# Altium PCB EXP_V111.PcbDoc (part 1 of 4)
Units mm, origin at the board's own origin, x right, y up, seen from the top; angles counter-clockwise.
Board outline 86 x 86 mm, 4 copper layers (Top Layer, Mid-Layer 1, Mid-Layer 2, Bottom Layer), stack 1.584 mm thick; 341 components, 287 nets, 1185 pads, 999 vias.
Unrouted connection lines stored in the file: 255.
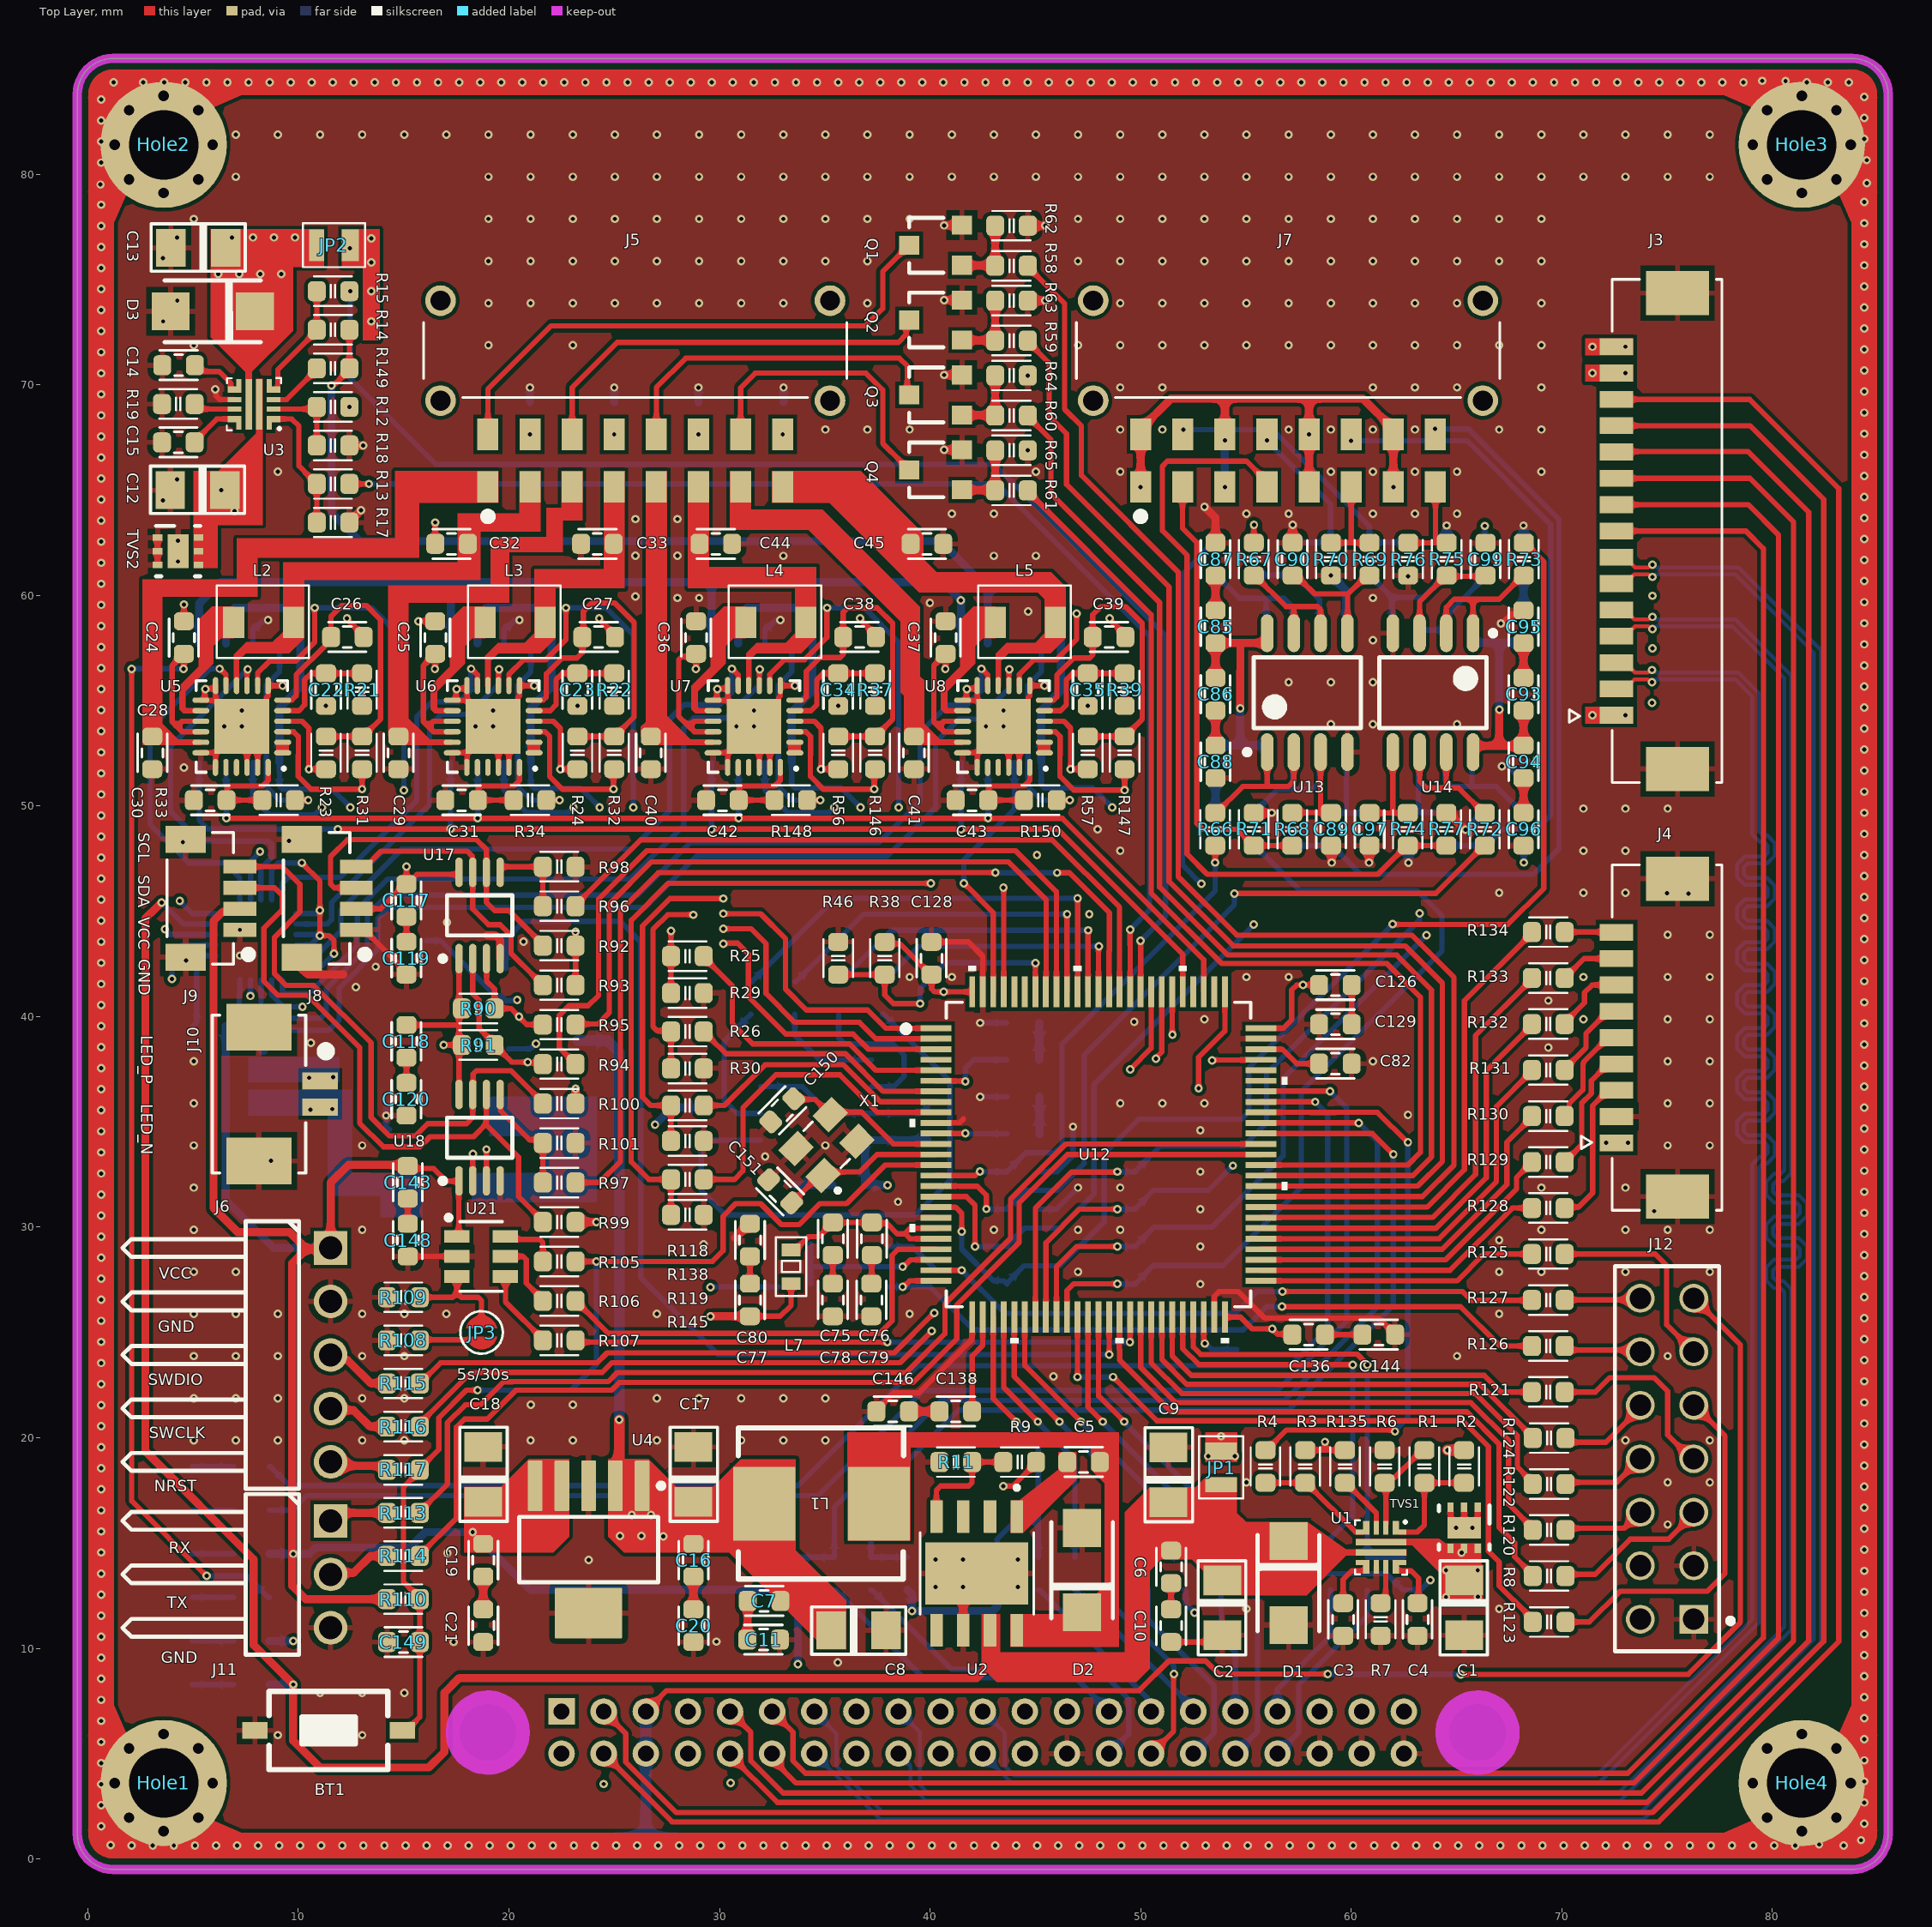
[diagram p0: Top Layer view]
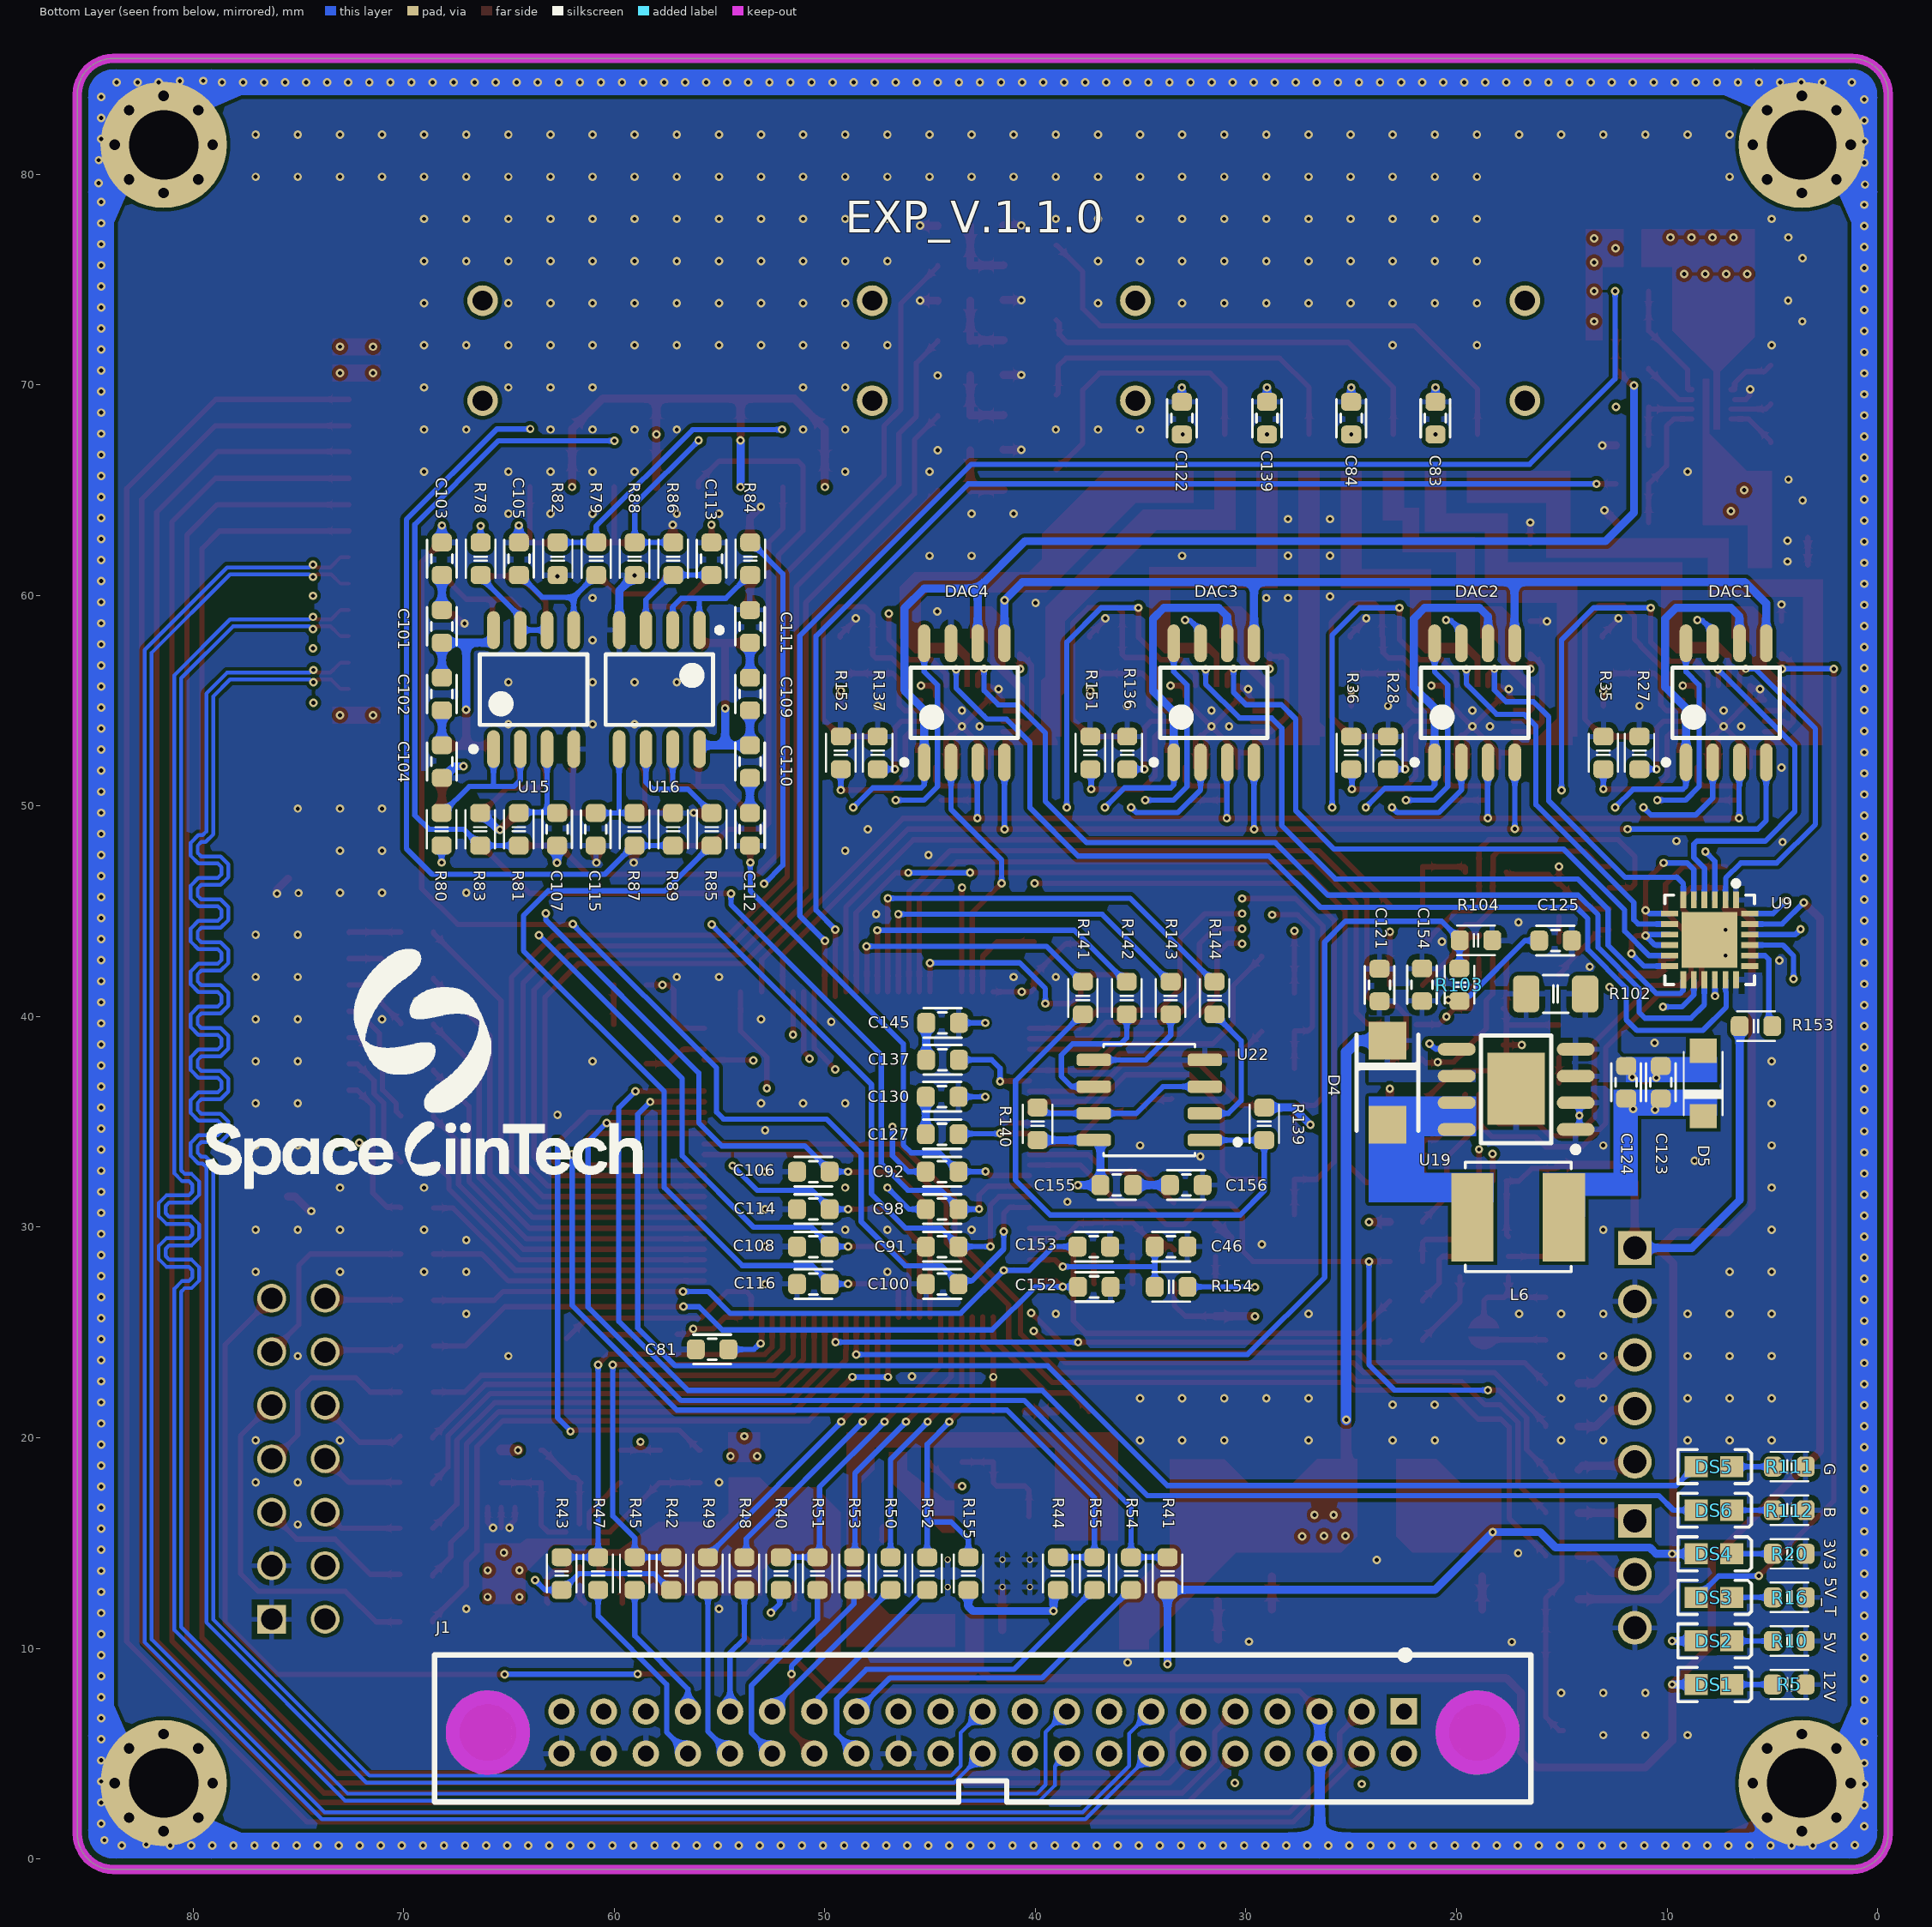
[diagram p1: Bottom Layer view, seen from below]
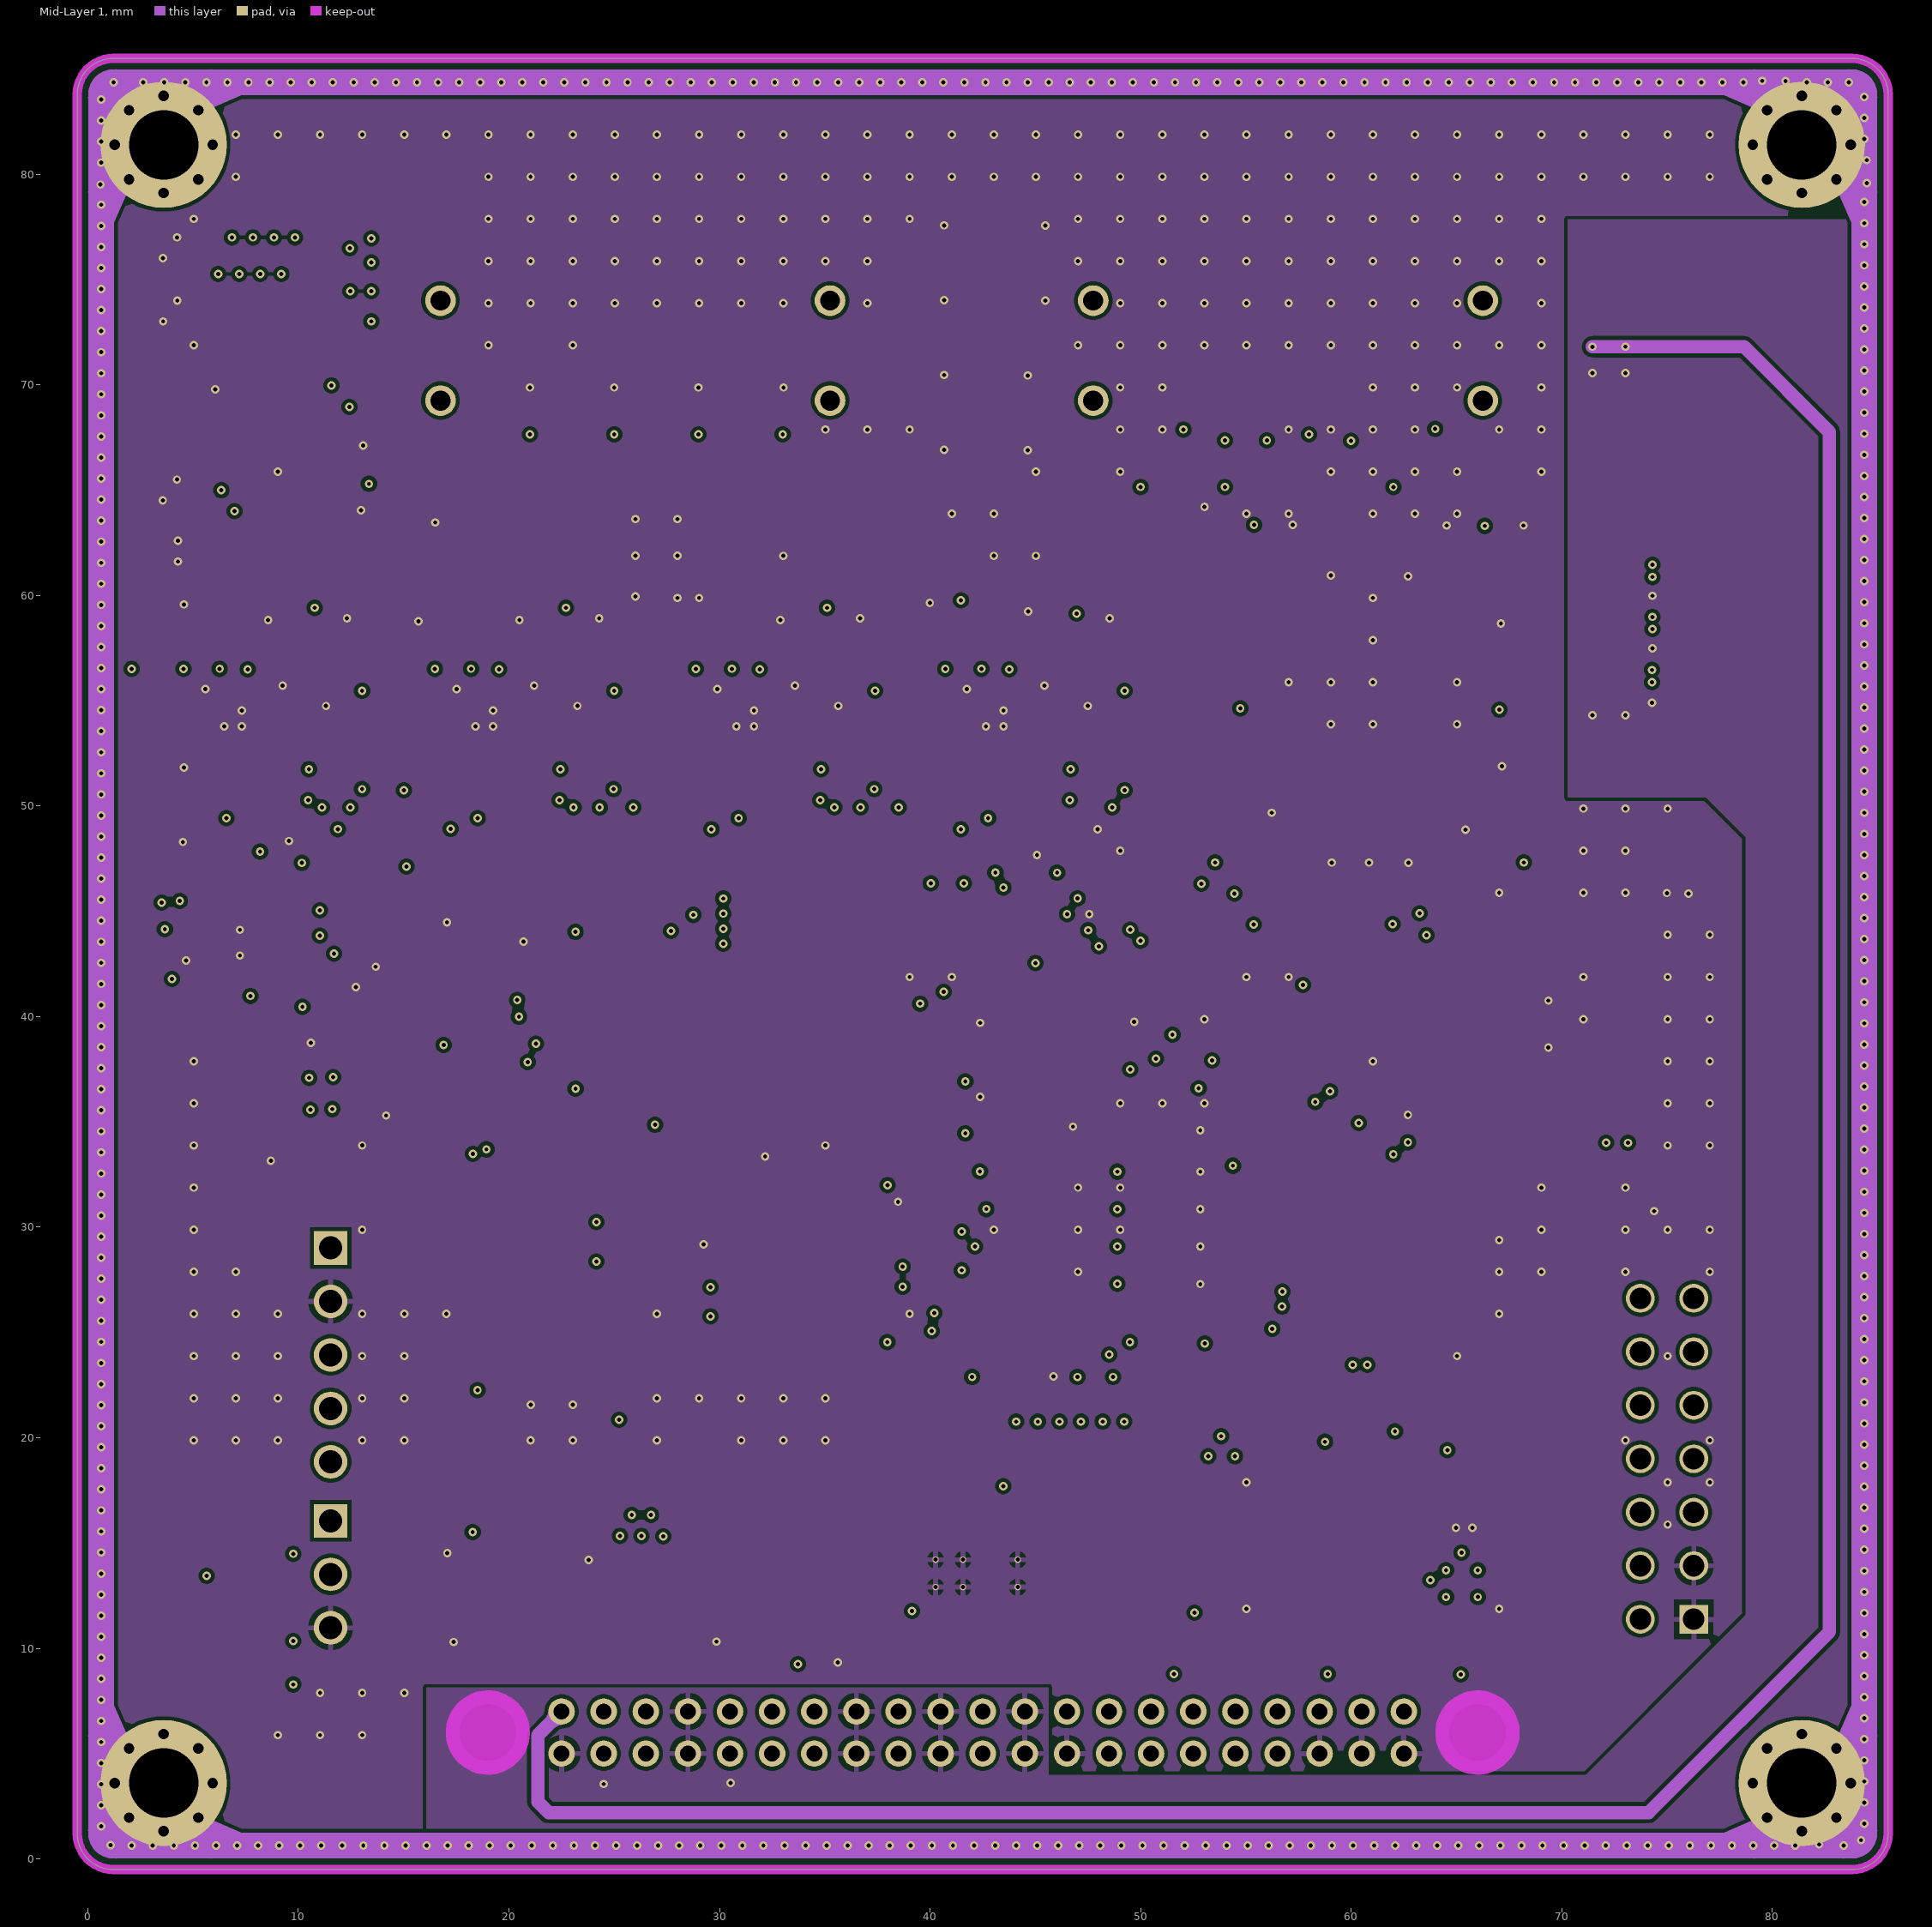
[diagram p2: Mid-Layer 1]
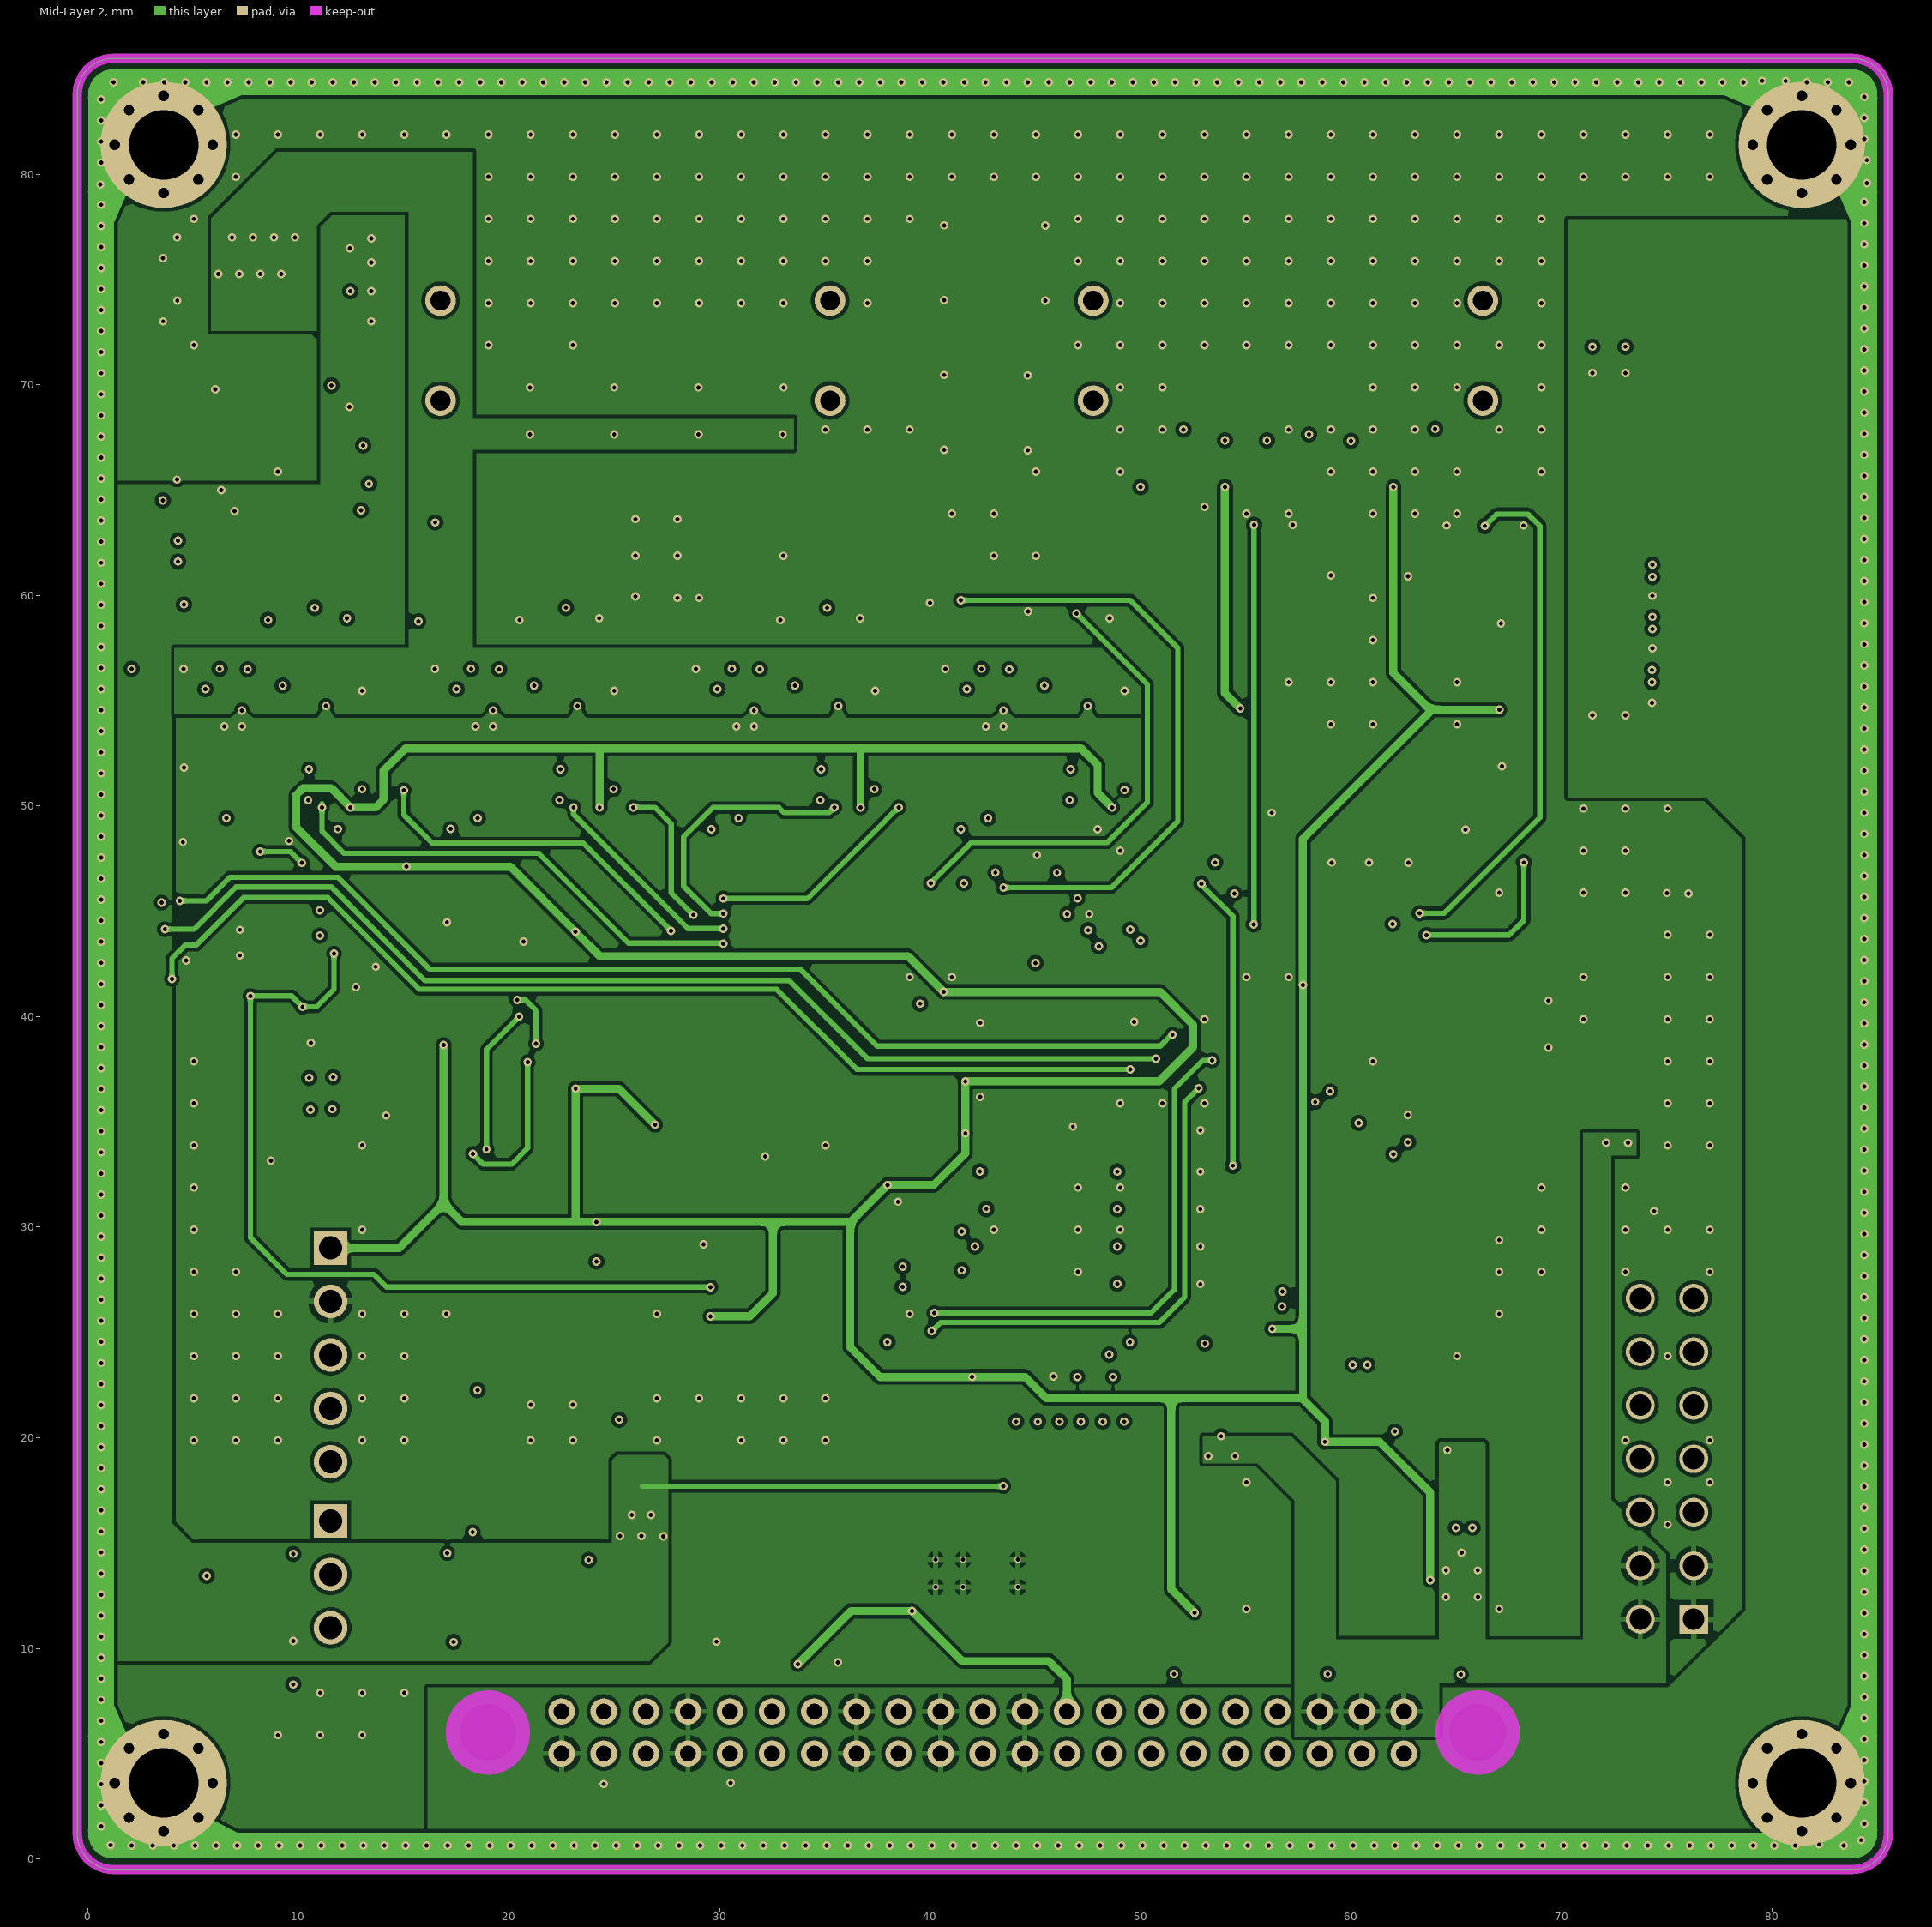
[diagram p3: Mid-Layer 2]
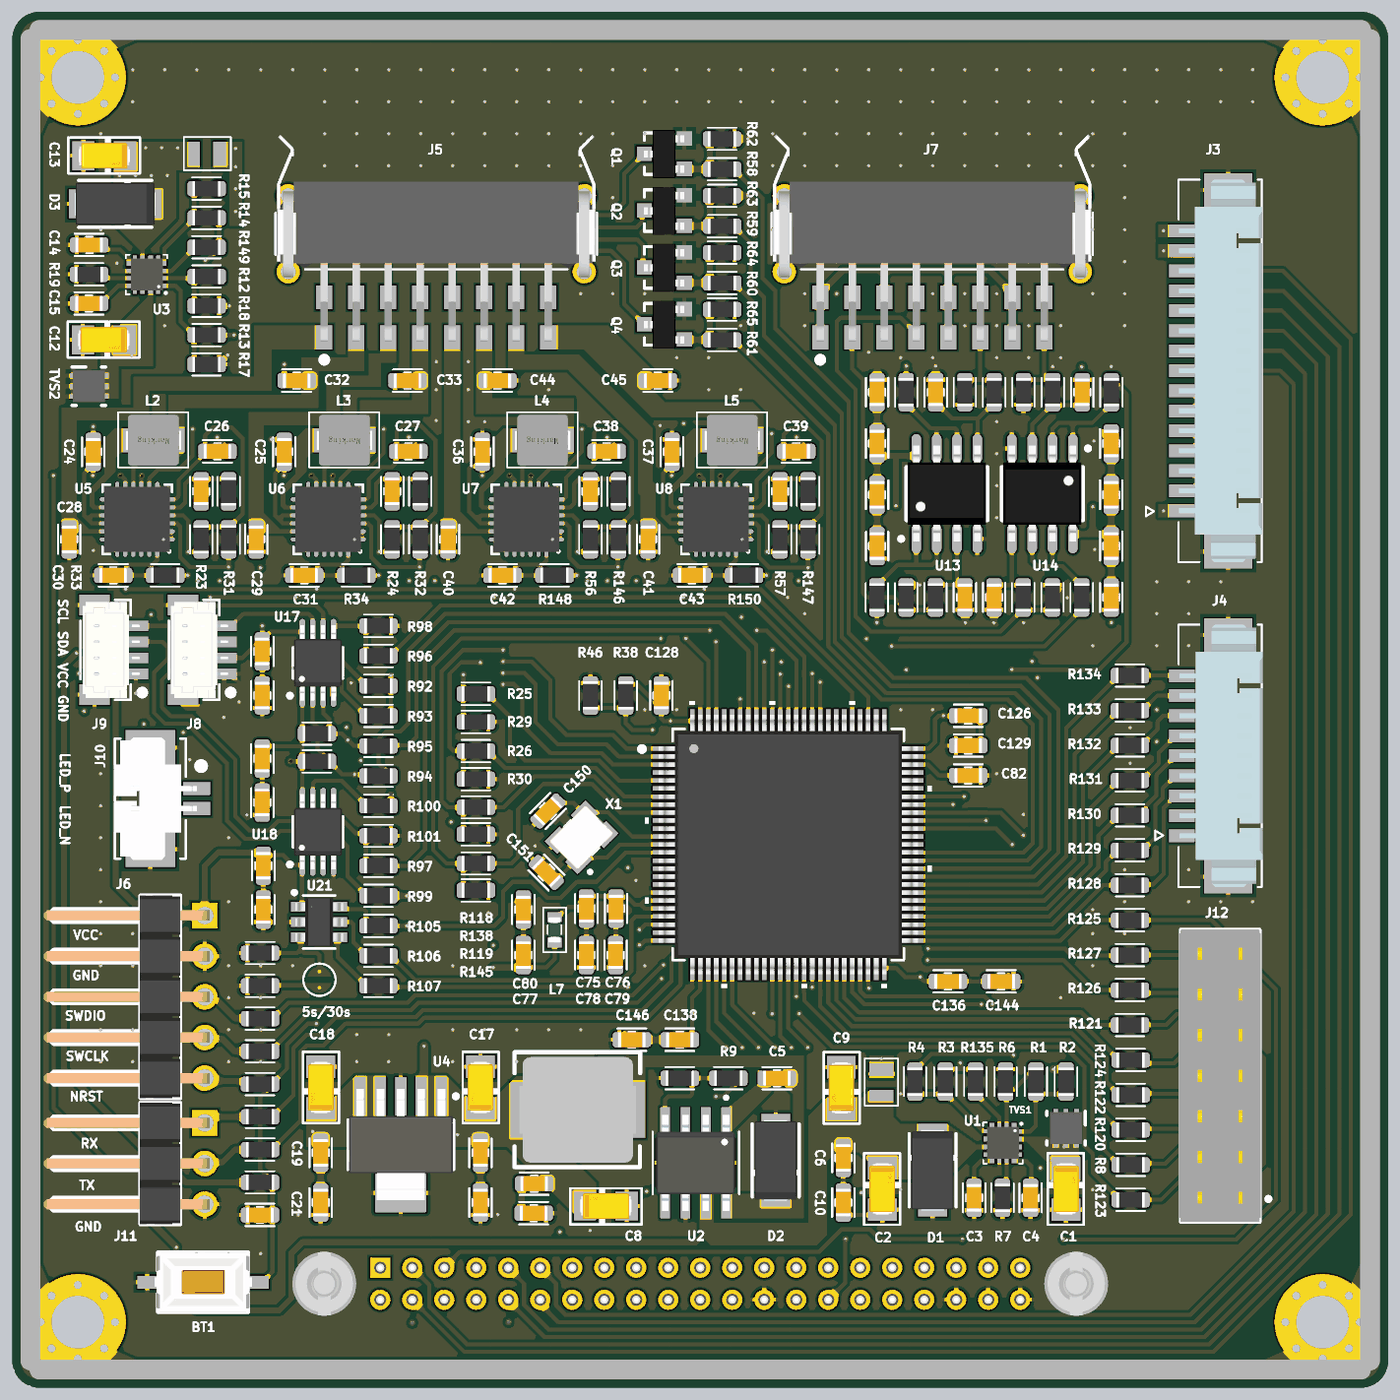
[diagram p7: 3D render of the assembled board from above, using the file's embedded part models]
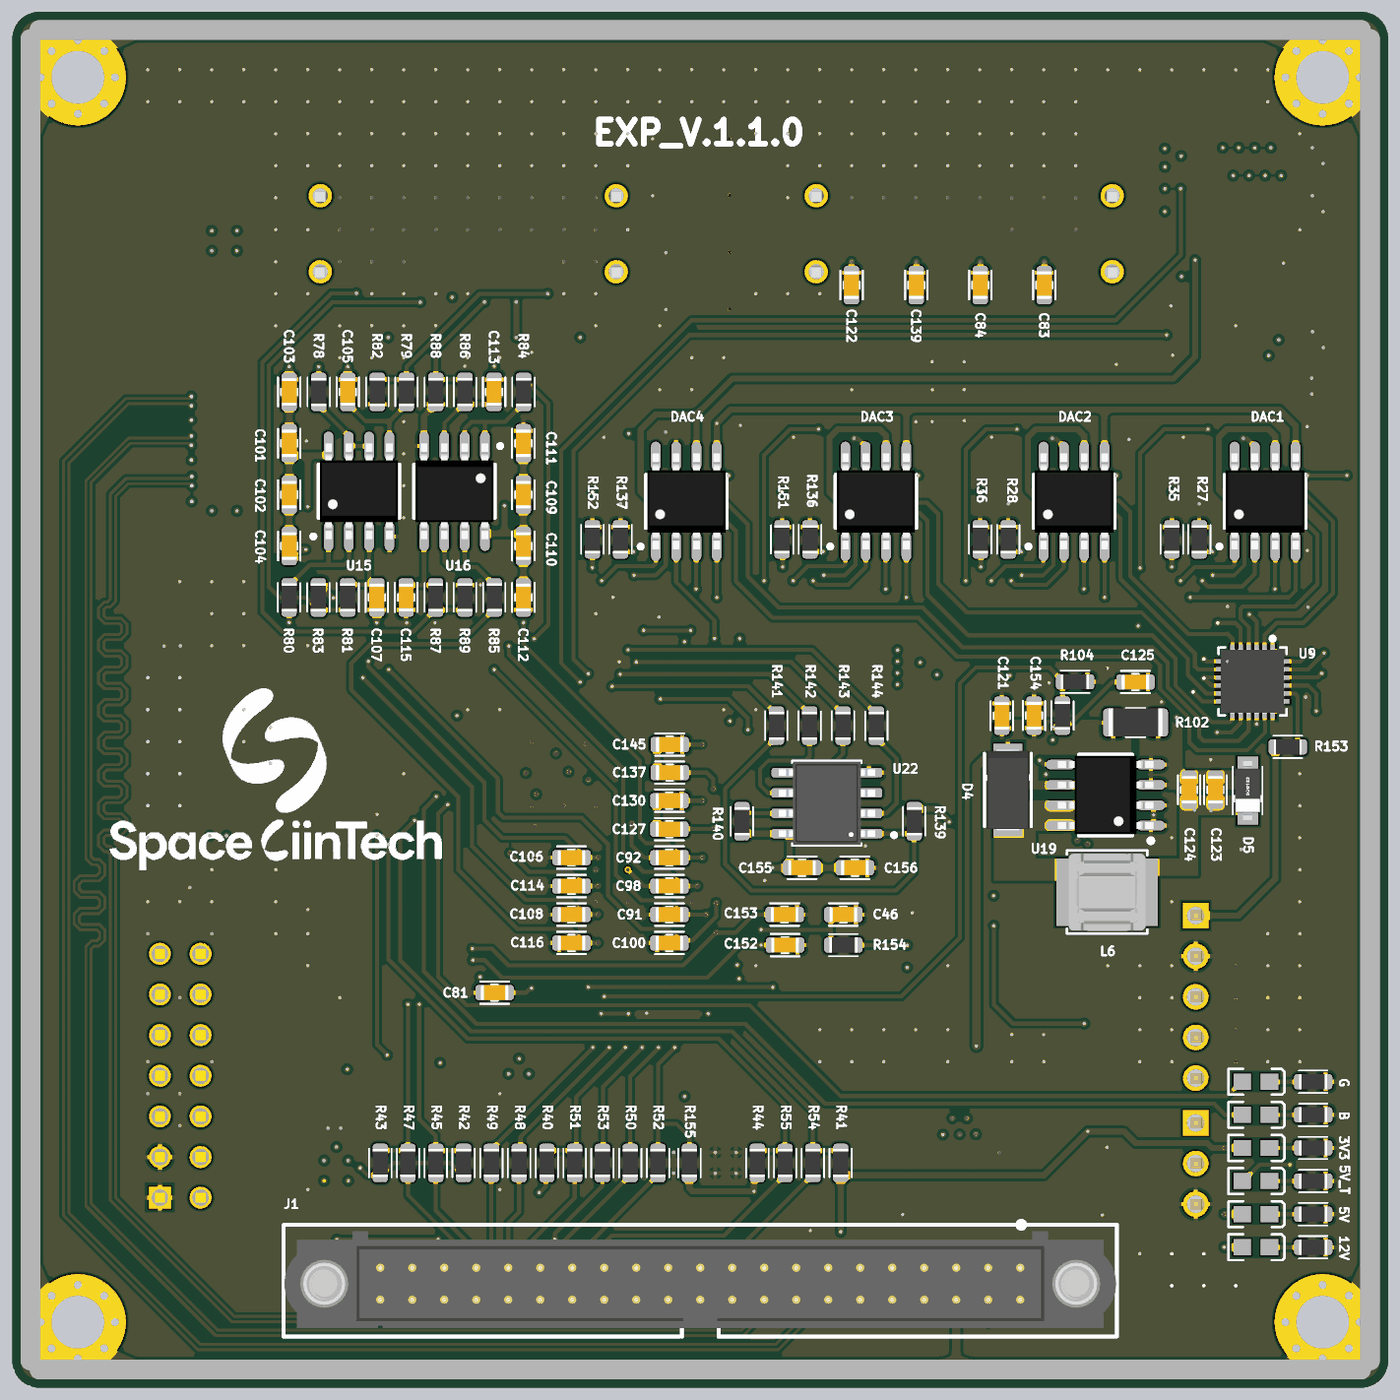
[diagram p8: 3D render of the assembled board from below, using the file's embedded part models]

## Layer stack, top to bottom
Top Solder: solder mask 0.012, SM-002, Dk 4
Top Layer: signal copper 0.04
Dielectric 1: prepreg 0.2, PP-022, Dk 4.5
Mid-Layer 1: signal copper 0.032
Dielectric2: core 1.04, Core-042, Dk 4.6
Mid-Layer 2: signal copper 0.032
Dielectric3: prepreg 0.2, PP-022, Dk 4.5
Bottom Layer: signal copper 0.04
Bottom Solder: solder mask 0.012, SM-002, Dk 4

## Board outline
1.2,-0.5 cw(c1.2,1.2) -0.5,1.2 -0.5,83.8 cw(c1.2,83.8) 1.197,85.5 1.202,85.5 83.799,85.5 83.804,85.5 cw(c83.8,83.8) 85.5,83.803 85.5,83.798 85.5,1.2 cw(c83.8,1.2) 83.8,-0.5

## Design rules (kind name [scope] priority, off if disabled: settings)
Clearance [NOT InNet('PROTECT_EMI') and NOT OnLayer('Keep-Out Layer') vs not OnLayer('Keep-out Layer')] p1: gap=0.178 ignorepadtopadclearanceinfootprint=TRUE except(0.15: Arc-Arc Arc-Track Track-Track)
DiffPairsRouting [InDifferentialPairClass('DIF100')] p1: maxlimit=0.15 minlimit=0.127 mostfreqgap=0.15 toplayer_mingap=0.15 toplayer_minwidth=0.18 toplayer_maxwidth=0.18 toplayer_prefwidth=0.18 midlayer1_maxgap=0.127 midlayer1_prefgap=0.127 midlayer1_minwidth=0.071 midlayer1_maxwidth=0.071 midlayer1_prefwidth=0.071 midlayer2_maxgap=0.127 midlayer2_prefgap=0.127 midlayer2_minwidth=0.071 midlayer2_maxwidth=0.071 midlayer2_prefwidth=0.071 bottomlayer_mingap=0.15 bottomlayer_minwidth=0.18 bottomlayer_maxwidth=0.18 bottomlayer_prefwidth=0.18 impedanceprofiledriven=TRUE impedanceprofileid={F898C893-B88C-4CB9-82E4-B530A9EF1E47} impedanceprofilevalue=100.000000 maxuncoupledlength=12.7
HoleSize [All] p1: absolutevalues=TRUE maxlimit=4 minlimit=0.025 maxpercent=80.000 minpercent=20.000
Length [InNetClass('USB_DATA')] p1: maxlimit=10 minlimit=0 usedelayunits=TRUE mindelay=84.500000 maxdelay=84.500000
MatchedLengths MatchedLengths_1 [InDifferentialPairClass('DIF100')] p1: tolerance=25.4 checknetsindiffpair=FALSE checkdiffpairvsdiffpair=TRUE checkxsignals=TRUE checkothers=TRUE usedelayunits=TRUE delaytolerance=20.000000
MatchedLengths [InAnyDifferentialPair] p2: tolerance=25.4 checknetsindiffpair=TRUE checkdiffpairvsdiffpair=FALSE checkxsignals=FALSE checkothers=FALSE usedelayunits=TRUE delaytolerance=5.000000
MinimumSolderMaskSliver [All] p1: minsoldermaskwidth=0.14
PolygonConnect [All] p1: thpad.connectstyle=Relief thpad.reliefconductorwidth=0.254 thpad.reliefentries=4 thpad.polygonreliefangle="90 Angle" thpad.airgapwidth=0.254 smdpad.connectstyle=Relief smdpad.reliefconductorwidth=0.254 smdpad.reliefentries=4 smdpad.polygonreliefangle="90 Angle" smdpad.airgapwidth=0.254 via.connectstyle=Direct via.reliefconductorwidth=0.254 via.reliefentries=4 via.polygonreliefangle="90 Angle" via.airgapwidth=0.254
RoutingVias [All] p1: holewidth=0.2 width=0.4 viastyle="Through Hole" minholewidth=0.2 minwidth=0.4 maxholewidth=0.2 maxwidth=0.4
SilkToSilkClearance [All] p1: silktosilkclearance=0.2
SilkToSolderMaskClearance [IsPad] p1: minsilkscreentomaskgap=0.1 clearancetoexposedcopper=TRUE
SolderMaskExpansion [All] p1: expansion=0.102 istentingtop=FALSE
SupplyNets "Schematic Supply Nets_7" [InNet('GND_CAM')] p1: voltage=0.000
SupplyNets "Schematic Supply Nets_6" [InNet('12V')] p2: voltage=0.000
SupplyNets "Schematic Supply Nets_5" [InNet('5V_TEMP')] p3: voltage=0.000
SupplyNets "Schematic Supply Nets_4" [InNet('5V')] p4: voltage=0.000
SupplyNets "Schematic Supply Nets_3" [InNet('GND')] p5: voltage=0.000
SupplyNets "Schematic Supply Nets_2" [InNet('5V_CAM')] p6: voltage=0.000
SupplyNets "Schematic Supply Nets_1" [InNet('12V_EXP')] p7: voltage=0.000
SupplyNets "Schematic Supply Nets" [InNet('+3.3')] p8: voltage=0.000
Width [All] p1: maxlimit=2 minlimit=0.254 preferedwidth=0.381
25 further rules are at their usual default settings.

## Classes and differential pairs
differential pair class DIF100: CAM_CK CAM_D0 CAM_D1
component class FRAM: C155 C156 R139 R140 R141 R142 R143 R144 U22
component class TEC_DRV: C22 C23 C24 C25 C26 C27 C28 C29 C30 C31 C32 C33 C34 C35 C36 C37 C38 C39 C40 C41 C42 C43 C44 C45 C46 DAC1 DAC2 DAC3 DAC4 g L2 L3 L4 L5 R21 R22 R23 R24 R25 R26 R27 R28 R29 R30 R31 R32 R33 R34 R35 R36 R37 R39 R56 R57 R118 R119 R136 R137 R138 R145 R146 R147 R148 R150 R151 R152 R153 R154 U5 U6 U7 U8 U9
component class POWER: C1 C2 C3 C4 C5 C6 C7 C8 C9 C10 C11 C12 C13 C14 C15 C16 C17 C18 C19 C20 C21 D1 D2 D3 DS1 DS2 DS3 DS4 JP1 JP2 L1 R1 R2 R3 R4 R5 R6 R7 R9 R10 R11 R12 R13 R14 R15 R16 R17 R18 R19 R20 R135 R149 TVS1 TVS2 U1 U2 U3 U4
component class IR_LED: C121 C123 C124 C125 C154 D4 D5 J10 L6 R102 R103 R104 U19
component class HEADER_2: Hole1 Hole2 Hole3 Hole4 J5 J7
component class HEADER_1: C152 C153 J1 J3 J4 J12 R8 R40 R41 R42 R43 R44 R45 R47 R48 R49 R50 R51 R52 R53 R54 R55 R120 R121 R122 R123 R124 R125 R126 R127 R128 R129 R130 R131 R132 R133 R134 R155
component class NTC: C85 C86 C87 C88 C89 C90 C91 C92 C93 C94 C95 C96 C97 C98 C99 C100 C101 C102 C103 C104 C105 C106 C107 C108 C109 C110 C111 C112 C113 C114 C115 C116 R66 R67 R68 R69 R70 R71 R72 R73 R74 R75 R76 R77 R78 R79 R80 R81 R82 R83 R84 R85 R86 R87 R88 R89 U13 U14 U15 U16
component class MCU: BT1 C75 C76 C77 C78 C79 C80 C81 C82 C126 C127 C128 C129 C130 C136 C137 C138 C143 C144 C145 C146 C148 C149 C150 C151 DS5 DS6 J6 J11 JP3 L7 R38 R46 R105 R106 R107 R108 R109 R110 R111 R112 R113 R114 R115 R116 R117 U12 U21 X1
component class I2C_SENSOR: C117 C118 C119 C120 J8 J9 R90 R91 R92 R93 R94 R95 R96 R97 R98 R99 R100 R101 U17 U18
component class HEATER: C83 C84 C122 C139 Q1 Q2 Q3 Q4 R58 R59 R60 R61 R62 R63 R64 R65
differential pair CAM_D1: +CAM_D1_P -CAM_D1_N
differential pair CAM_D0: +CAM_D0_P -CAM_D0_N
differential pair CAM_CK: +CAM_CK_P -CAM_CK_N

## Components (designator, comment, footprint, x,y, rotation, side; value= is the part's Value field where it differs from the comment)
BT1 "BT_NRST" SW1-SMD 11.43,6.096 r0 top value="SW chip 2 pin"
C1 "33uF/16V" TANTALUM-SMD-1206 65.364,11.928 r90 top
C2 "33uF/16V" TANTALUM-SMD-1206 53.881,11.928 r90 top
C3 "2.2nF/16V" CAP_C_1608X80 59.617,11.37 r90 top value=33pF
C4 "2.2nF/16V" CAP_C_1608X80 63.149,11.37 r90 top value=33pF
C5 "0.01uF/16V" CAP_C_1608X80 47.292,18.846 r180 top value=33pF
C6 "0.22uF/16V" CAP_C_1608X80 51.445,13.865 r90 top value=33pF
C7 "0.22uF/10V" CAP_C_1608X80 32.121,12.25 r0 top value=33pF
C8 "33uF/16V" TANTALUM-SMD-1206 36.604,10.858 r180 top
C9 "33uF/16V" TANTALUM-SMD-1206 51.32,18.234 r270 top
C10 "0.22uF/16V" CAP_C_1608X80 51.445,11.074 r90 top value=33pF
C11 "0.22uF/10V" CAP_C_1608X80 32.089,10.412 r180 top value=33pF
C12 "33uF/16V" TANTALUM-SMD-1206 5.216,64.995 r0 top
C13 "33uF/16V" TANTALUM-SMD-1206 5.248,76.505 r0 top
C14 "2.2nF/16V" CAP_C_1608X80 4.309,70.93 r0 top value=33pF
C15 "2.2nF/16V" CAP_C_1608X80 4.295,67.269 r0 top value=33pF
C16 "0.22uF/10V" CAP_C_1608X80 28.761,14.186 r90 top value=33pF
C17 "33uF/16V" TANTALUM-SMD-1206 28.761,18.258 r270 top
C18 "33uF/16V" TANTALUM-SMD-1206 18.779,18.258 r270 top
C19 "0.22uF/10V" CAP_C_1608X80 18.779,14.186 r90 top value=33pF
C20 "0.22uF/10V" CAP_C_1608X80 28.761,11.074 r90 top value=33pF
C21 "0.22uF/10V" CAP_C_1608X80 18.779,11.074 r90 top value=33pF
C22 "0.1uF/10V" CAP_C_1608X80 11.312,55.525 r90 top value=33pF
C23 "0.1uF/10V" CAP_C_1608X80 23.25,55.525 r90 top value=33pF
C24 "10uF/10V" CAP_C_1608X80 4.562,58 r270 top value=33pF
C25 "10uF/10V" CAP_C_1608X80 16.5,58 r270 top value=33pF
C26 "0.1uF/10V" CAP_C_1608X80 12.325,58.025 r180 top value=33pF
C27 "0.1uF/10V" CAP_C_1608X80 24.262,58.025 r180 top value=33pF
C28 "0.1uF/10V" CAP_C_1608X80 3.062,52.525 r90 top value=33pF
C29 "0.1uF/10V" CAP_C_1608X80 14.75,52.525 r90 top value=33pF
C30 "0.1uF/10V" CAP_C_1608X80 5.812,50.275 r0 top value=33pF
C31 "0.1uF/10V" CAP_C_1608X80 17.75,50.275 r0 top value=33pF
C32 "10uF/10V" CAP_C_1608X80 17.275,62.45 r0 top value=33pF
C33 "10uF/10V" CAP_C_1608X80 24.2,62.45 r0 top value=33pF
C34 "0.1uF/10V" CAP_C_1608X80 35.637,55.525 r90 top value=33pF
C35 "0.1uF/10V" CAP_C_1608X80 47.488,55.525 r90 top value=33pF
C36 "10uF/10V" CAP_C_1608X80 28.887,58 r270 top value=33pF
C37 "10uF/10V" CAP_C_1608X80 40.738,58 r270 top value=33pF
C38 "0.1uF/10V" CAP_C_1608X80 36.649,58.025 r180 top value=33pF
C39 "0.1uF/10V" CAP_C_1608X80 48.5,58.025 r180 top value=33pF
C40 "0.1uF/10V" CAP_C_1608X80 26.737,52.525 r90 top value=33pF
C41 "0.1uF/10V" CAP_C_1608X80 39.238,52.525 r90 top value=33pF
C42 "0.1uF/10V" CAP_C_1608X80 30.137,50.275 r0 top value=33pF
C43 "0.1uF/10V" CAP_C_1608X80 41.988,50.275 r0 top value=33pF
C44 "10uF/10V" CAP_C_1608X80 29.825,62.45 r180 top value=33pF
C45 "10uF/10V" CAP_C_1608X80 39.85,62.45 r180 top value=33pF
C46 "0.1uF/10V" CAP_C_1608X80 33.553,29.076 r0 bottom value=33pF
C75 "0.22uF/10V" CAP_C_1608X80 35.382,29.45 r90 top value=33pF
C76 "1uF/10V" CAP_C_1608X80 37.236,29.45 r90 top value=33pF
C77 "1uF/10V" CAP_C_1608X80 31.445,26.542 r270 top value=33pF
C78 "0.22uF/10V" CAP_C_1608X80 35.382,26.542 r90 top value=33pF
C79 "1uF/10V" CAP_C_1608X80 37.211,26.542 r90 top value=33pF
C80 "1uF/10V" CAP_C_1608X80 31.445,29.387 r270 top value=33pF
C81 "1uF/10V" CAP_C_1608X80 55.353,24.197 r180 bottom value=33pF
C82 "1uF/10V" CAP_C_1608X80 59.25,37.764 r180 top value=33pF
C83 "4.7uF/10V" CAP_C_1608X80 21,68.416 r270 bottom value=33pF
C84 "0.1uF/10V" CAP_C_1608X80 25,68.416 r270 bottom value=33pF
C85 "0.22uF/10V" CAP_C_1608X80 53.554,58.515 r270 top value=33pF
C86 "0.22uF/10V" CAP_C_1608X80 53.554,55.308 r90 top value=33pF
C87 "0.22uF/10V" CAP_C_1608X80 53.554,61.722 r270 top value=33pF
C88 "0.22uF/10V" CAP_C_1608X80 53.554,52.102 r90 top value=33pF
C89 "0.22uF/10V" CAP_C_1608X80 59.041,48.895 r90 top value=33pF
C90 "0.22uF/10V" CAP_C_1608X80 57.219,61.722 r270 top value=33pF
C91 "0.22uF/10V" CAP_C_1608X80 44.427,29.076 r180 bottom value=33pF
C92 "0.22uF/10V" CAP_C_1608X80 44.427,32.634 r180 bottom value=33pF
C93 "0.22uF/10V" CAP_C_1608X80 68.186,55.308 r270 top value=33pF
C94 "0.22uF/10V" CAP_C_1608X80 68.186,52.102 r90 top value=33pF
C95 "0.22uF/10V" CAP_C_1608X80 68.186,58.515 r270 top value=33pF
C96 "0.22uF/10V" CAP_C_1608X80 68.186,48.895 r90 top value=33pF
C97 "0.22uF/10V" CAP_C_1608X80 60.87,48.895 r90 top value=33pF
C98 "0.22uF/10V" CAP_C_1608X80 44.427,30.855 r180 bottom value=33pF
C99 "0.22uF/10V" CAP_C_1608X80 66.379,61.722 r270 top value=33pF
C100 "0.22uF/10V" CAP_C_1608X80 44.427,27.297 r180 bottom value=33pF
C101 "0.22uF/10V" CAP_C_1608X80 68.186,58.53 r270 bottom value=33pF
C102 "0.22uF/10V" CAP_C_1608X80 68.186,55.318 r90 bottom value=33pF
C103 "0.22uF/10V" CAP_C_1608X80 68.186,61.742 r270 bottom value=33pF
C104 "0.22uF/10V" CAP_C_1608X80 68.186,52.107 r90 bottom value=33pF
C105 "0.22uF/10V" CAP_C_1608X80 64.528,61.742 r270 bottom value=33pF
C106 "0.22uF/10V" CAP_C_1608X80 50.547,32.634 r180 bottom value=33pF
C107 "0.22uF/10V" CAP_C_1608X80 62.715,48.895 r90 bottom value=33pF
C108 "0.22uF/10V" CAP_C_1608X80 50.547,29.076 r180 bottom value=33pF
C109 "0.22uF/10V" CAP_C_1608X80 53.554,55.318 r270 bottom value=33pF
C110 "0.22uF/10V" CAP_C_1608X80 53.554,52.107 r90 bottom value=33pF
C111 "0.22uF/10V" CAP_C_1608X80 53.554,58.53 r270 bottom value=33pF
C112 "0.22uF/10V" CAP_C_1608X80 53.554,48.895 r90 bottom value=33pF
C113 "0.22uF/10V" CAP_C_1608X80 55.383,61.742 r270 bottom value=33pF
C114 "0.22uF/10V" CAP_C_1608X80 50.547,30.855 r180 bottom value=33pF
C115 "0.22uF/10V" CAP_C_1608X80 60.883,48.895 r90 bottom value=33pF
C116 "0.22uF/10V" CAP_C_1608X80 50.547,27.297 r180 bottom value=33pF
C117 "1uF/10V" CAP_C_1608X80 15.131,45.518 r90 top value=33pF
C118 "0.22uF/10V" CAP_C_1608X80 15.131,38.824 r90 top value=33pF
C119 "1uF/10V" CAP_C_1608X80 15.131,42.771 r90 top value=33pF
C120 "0.22uF/10V" CAP_C_1608X80 15.131,36.077 r90 top value=33pF
C121 "4.7uF/10V" CAP_C_1608X80 23.65,41.5 r270 bottom value=33pF
C122 "0.1uF/10V" CAP_C_1608X80 33.045,68.416 r270 bottom value=33pF
C123 "1uF/10V" CAP_C_1608X80 10.297,36.876 r90 bottom value=33pF
C124 "1uF/10V" CAP_C_1608X80 11.944,36.876 r90 bottom value=33pF
C125 "470nF/10V" CAP_C_1608X80 15.301,43.607 r0 bottom value=33pF
C126 "0.22uF/10V" CAP_C_1608X80 59.25,41.5 r180 top value=33pF
C127 "0.22uF/10V" CAP_C_1608X80 44.427,34.413 r180 bottom value=33pF
C128 "4.7uF/10V" CAP_C_1608X80 40.07,42.77 r270 top value=33pF
C129 "0.22uF/10V" CAP_C_1608X80 59.25,39.632 r0 top value=33pF
C130 "0.22uF/10V" CAP_C_1608X80 44.427,36.192 r0 bottom value=33pF
C136 "0.22uF/10V" CAP_C_1608X80 57.98,24.897 r180 top value=33pF
C137 "0.22uF/10V" CAP_C_1608X80 44.407,37.946 r180 bottom value=33pF
C138 "0.22uF/10V" CAP_C_1608X80 41.223,21.25 r0 top value=33pF
C139 "0.1uF/10V" CAP_C_1608X80 29,68.416 r270 bottom value=33pF
C143 "0.22uF/10V" CAP_C_1608X80 15.194,32.131 r90 top value=33pF
C144 "0.22uF/10V" CAP_C_1608X80 61.309,24.897 r180 top value=33pF
C145 "0.22uF/10V" CAP_C_1608X80 44.407,39.7 r0 bottom value=33pF
C146 "0.22uF/10V" CAP_C_1608X80 38.224,21.25 r0 top value=33pF
C148 "0.22uF/10V" CAP_C_1608X80 15.194,29.384 r90 top value=33pF
C149 "0.22uF/10V" CAP_C_1608X80 14.986,10.299 r0 top value=33pF
C150 "12pF/10V" CAP_C_1608X80 32.981,35.549 r225 top value=33pF
C151 "12pF/10V" CAP_C_1608X80 32.882,31.702 r315 top value=33pF
C152 "0.22uF/10V" CAP_C_1608X80 37.2,27.165 r0 bottom value=33pF
C153 "0.22uF/10V" CAP_C_1608X80 37.225,29.076 r0 bottom value=33pF
C154 "0.1uF/10V" CAP_C_1608X80 21.637,41.511 r270 bottom value=33pF
C155 "0.22uF/10V" CAP_C_1608X80 36.136,31.999 r0 bottom value=33pF
C156 "0.22uF/10V" CAP_C_1608X80 32.834,31.999 r0 bottom value=33pF
D1 "SS54" DO214-AC-SMA 57.025,13.096 r270 top
D2 "SS54" DO214-AC-SMA 47.216,13.71 r90 top
D3 "SS54" DO214-AC-SMA 5.934,73.496 r180 top
D4 "SS54" DO214-AC-SMA 23.274,36.86 r270 bottom
D5 "1N4148W-TP" SOD-123 8.282,36.822 r0 bottom value=100V/300MA
DAC1 "MCP4921-E/SN" SO8 7.197,54.9 r90 bottom
DAC2 "MCP4921-E/SN" SO8 19.135,54.9 r90 bottom
DAC3 "MCP4921-E/SN" SO8 31.522,54.9 r90 bottom
DAC4 "MCP4921-E/SN" SO8 43.373,54.9 r90 bottom
DS1 "RED" LED-0603-BLUE 7.772,8.28 r180 bottom value="LED 3 - 5 ly 2 Colour"
DS2 "RED" LED-0603-BLUE 7.772,10.35 r180 bottom value="LED 3 - 5 ly 2 Colour"
DS3 "RED" LED-0603-BLUE 7.772,12.419 r180 bottom value="LED 3 - 5 ly 2 Colour"
DS4 "YELLOW" LED-0603-BLUE 7.772,14.488 r180 bottom value="LED 3 - 5 ly 2 Colour"
DS5 "GREEN" LED-0603-BLUE 7.772,18.627 r180 bottom value="LED 3 - 5 ly 2 Colour"
DS6 "BLUE" LED-0603-BLUE 7.772,16.557 r180 bottom value="LED 3 - 5 ly 2 Colour"
Hole1 "hole_space" HOLE_SPACE 3.6,3.6 r0 top
Hole2 "hole_space" HOLE_SPACE 3.6,81.4 r0 top
Hole3 "hole_space" HOLE_SPACE 81.4,81.4 r0 top
Hole4 "hole_space" HOLE_SPACE 81.4,3.6 r0 top
J1 "M80-5114242" M80-5114242 42.5,6 r0 bottom locked
J3 "0532611571" 0532611571 75,63.06 r90 top
J4 "0532610971" 0532610971 75,39 r90 top
J5 "M80-6661642" M80-6661642 26,72 r180 top
J6 "JP5" JP5-D1C 8.992,17.582 r270 top locked
J7 "M80-6661642" M80-6661642 57,72 r180 top locked
J8 "BM04B-SRSS-TB" BM04B-SRSS-TB 10.866,45.618 r90 top
J9 "BM04B-SRSS-TB" BM04B-SRSS-TB 5.339,45.618 r90 top
J10 "0532610271" 0532610271 8.128,36.322 r90 top locked
J11 "JP3" JP3-D1C 8.992,9.703 r270 top locked
J12 "ESQ-107-48-G-D" ESQ-107-37-G-D 75,19 r90 top
JP1 "jumper2" JUMPER 53.823,18.57 r270 top
JP2 "jumper2" JUMPER 11.667,76.631 r180 top
JP3 "jumper2" JUMPER2 18.7,25 r180 top
L1 "SRP7050TA-220M" PSM6050 34.846,16.868 r90 top
L2 "1uH" L-SMD-M-3.5X3.5X2MM 8.312,58.75 r270 top
L3 "1uH" L-SMD-M-3.5X3.5X2MM 20.25,58.75 r270 top
L4 "1uH" L-SMD-M-3.5X3.5X2MM 32.637,58.75 r270 top
L5 "1uH" L-SMD-M-3.5X3.5X2MM 44.488,58.75 r270 top
L6 "82uH" L-SMD-M-4.8X4.8X2.8MM 17.07,30.472 r270 bottom
L7 "10uH/250mA" L-SMD-0603 33.401,28.117 r90 top
Q1 "AO3400A" SOT23-13_2 40.258,76.632 r90 top
Q2 "AO3400A" SOT23-13_2 40.258,73.076 r90 top
Q3 "AO3400A" SOT23-13_2 40.258,69.52 r90 top
Q4 "AO3400A" SOT23-13_2 40.258,65.964 r90 top
R1 "11k" RES_C_1608X60 63.476,18.634 r90 top
R2 "470k" RES_C_1608X60 65.364,18.634 r270 top
R3 "10k" RES_C_1608X60 57.814,18.634 r270 top
R4 "22R" RES_C_1608X60 55.927,18.634 r90 top
R5 "4.7k" RES_C_1608X60 4.191,8.28 r180 bottom
R6 "47k" RES_C_1608X60 61.589,18.634 r90 top
R7 "1k" RES_C_1608X60 61.395,11.37 r270 top
R8 "22R" RES_C_1608X60 69.4,13.434 r0 top
R9 "10k" RES_C_1608X60 44.258,18.846 r180 top
R10 "2.2k" RES_C_1608X60 4.191,10.35 r180 bottom
R11 "3.24k" RES_C_1608X60 41.223,18.846 r180 top
R12 "470k" RES_C_1608X60 11.648,68.954 r180 top
R13 "120R" RES_C_1608X60 11.648,65.293 r180 top
R14 "10k" RES_C_1608X60 11.648,72.615 r180 top
R15 "22R" RES_C_1608X60 11.648,74.445 r0 top
R16 "2.2k" RES_C_1608X60 4.191,12.419 r180 bottom
R17 "10k" RES_C_1608X60 11.648,63.463 r0 top
R18 "130k" RES_C_1608X60 11.648,67.124 r0 top
R19 "1k" RES_C_1608X60 4.295,69.087 r180 top
R20 "2.2k" RES_C_1608X60 4.191,14.488 r180 bottom
R21 "10R" RES_C_1608X60 13.025,55.525 r90 top
R22 "10R" RES_C_1608X60 25,55.525 r90 top
R23 "91k" RES_C_1608X60 11.312,52.525 r270 top
R24 "91k" RES_C_1608X60 23.25,52.525 r270 top
R25 "22R" RES_C_1608X60 28.475,42.87 r180 top
R26 "22R" RES_C_1608X60 28.475,39.291 r180 top
R27 "36.5k" RES_C_1608X60 11.312,52.525 r90 bottom
R28 "36.5k" RES_C_1608X60 23.25,52.525 r90 bottom
R29 "10k" RES_C_1608X60 28.475,41.116 r0 top
R30 "10k" RES_C_1608X60 28.475,37.536 r0 top
R31 "6.65k" RES_C_1608X60 13.025,52.525 r270 top
R32 "6.65k" RES_C_1608X60 25,52.525 r270 top
R33 "1k" RES_C_1608X60 9.062,50.275 r180 top
R34 "1k" RES_C_1608X60 21,50.275 r180 top
R35 "10k" RES_C_1608X60 13.025,52.525 r90 bottom
R36 "10k" RES_C_1608X60 25,52.525 r90 bottom
R37 "10R" RES_C_1608X60 37.387,55.525 r90 top
R38 "10k/DNP" RES_C_1608X60 37.847,42.77 r270 top
R39 "10R" RES_C_1608X60 49.238,55.525 r90 top
R40 "4.7k" RES_C_1608X60 52.084,13.549 r90 bottom
R41 "4.7k" RES_C_1608X60 33.723,13.549 r90 bottom
R42 "4.7k" RES_C_1608X60 57.292,13.549 r90 bottom
R43 "4.7k" RES_C_1608X60 62.5,13.549 r90 bottom
R44 "4.7k" RES_C_1608X60 38.931,13.549 r90 bottom
R45 "22R" RES_C_1608X60 59.028,13.549 r270 bottom
R46 "10k" RES_C_1608X60 35.636,42.77 r90 top
R47 "22R" RES_C_1608X60 60.764,13.549 r90 bottom
R48 "22R" RES_C_1608X60 53.82,13.549 r270 bottom
R49 "22R" RES_C_1608X60 55.556,13.549 r90 bottom
R50 "22R" RES_C_1608X60 46.876,13.549 r270 bottom
R51 "22R" RES_C_1608X60 50.348,13.549 r90 bottom
R52 "22R" RES_C_1608X60 45.14,13.549 r270 bottom
R53 "22R" RES_C_1608X60 48.612,13.549 r90 bottom
R54 "22R" RES_C_1608X60 35.459,13.549 r270 bottom
R55 "22R" RES_C_1608X60 37.195,13.549 r90 bottom
R56 "91k" RES_C_1608X60 35.637,52.525 r270 top
R57 "91k" RES_C_1608X60 47.488,52.525 r270 top
R58 "120R" RES_C_1608X60 43.867,75.656 r180 top
R59 "120R" RES_C_1608X60 43.867,72.1 r180 top
R60 "120R" RES_C_1608X60 43.867,68.544 r180 top
R61 "120R" RES_C_1608X60 43.867,64.988 r180 top
R62 "10k" RES_C_1608X60 43.867,77.556 r180 top
R63 "10k" RES_C_1608X60 43.867,74 r180 top
R64 "10k" RES_C_1608X60 43.867,70.444 r180 top
R65 "10k" RES_C_1608X60 43.867,66.888 r180 top
R66 "22R" RES_C_1608X60 53.542,48.895 r270 top
R67 "22R" RES_C_1608X60 55.374,61.722 r90 top
R68 "22R" RES_C_1608X60 57.2,48.895 r90 top
R69 "22R" RES_C_1608X60 60.87,61.722 r270 top
R70 "10k" RES_C_1608X60 59.038,61.722 r270 top
R71 "10k" RES_C_1608X60 55.371,48.895 r90 top
R72 "22R" RES_C_1608X60 66.344,48.895 r270 top
R73 "22R" RES_C_1608X60 68.198,61.722 r90 top
R74 "22R" RES_C_1608X60 62.687,48.895 r90 top
R75 "22R" RES_C_1608X60 64.534,61.722 r270 top
R76 "10k" RES_C_1608X60 62.702,61.722 r270 top
R77 "10k" RES_C_1608X60 64.516,48.895 r90 top
R78 "22R" RES_C_1608X60 66.345,61.742 r90 bottom
R79 "22R" RES_C_1608X60 60.858,61.742 r270 bottom
R80 "22R" RES_C_1608X60 68.198,48.895 r270 bottom
R81 "22R" RES_C_1608X60 64.534,48.895 r90 bottom
R82 "10k" RES_C_1608X60 62.687,61.742 r270 bottom
R83 "10k" RES_C_1608X60 66.366,48.895 r90 bottom
R84 "22R" RES_C_1608X60 53.542,61.742 r90 bottom
R85 "22R" RES_C_1608X60 55.374,48.895 r270 bottom
R86 "22R" RES_C_1608X60 57.2,61.742 r270 bottom
R87 "22R" RES_C_1608X60 59.038,48.895 r90 bottom
R88 "10k" RES_C_1608X60 59.029,61.742 r270 bottom
R89 "10k" RES_C_1608X60 57.206,48.895 r90 bottom
R90 "4.7k" RES_C_1608X60 18.542,40.386 r0 top
R91 "4.7k" RES_C_1608X60 18.542,38.649 r0 top
R92 "4.7k" RES_C_1608X60 22.388,43.367 r180 top
R93 "4.7k" RES_C_1608X60 22.388,41.493 r180 top
R94 "22R" RES_C_1608X60 22.388,37.744 r180 top
R95 "22R" RES_C_1608X60 22.388,39.618 r180 top
R96 "22R" RES_C_1608X60 22.388,45.242 r180 top
R97 "22R" RES_C_1608X60 22.388,32.12 r180 top
R98 "10k" RES_C_1608X60 22.388,47.116 r0 top
R99 "4.7k" RES_C_1608X60 22.388,30.246 r180 top
R100 "4.7k" RES_C_1608X60 22.388,35.869 r180 top
R101 "10k" RES_C_1608X60 22.388,33.995 r0 top
R102 "0.2R" RES_C_3216X70 15.291,41.075 r0 bottom
R103 "1k" RES_C_1608X60 19.861,41.511 r90 bottom
R104 "10k" RES_C_1608X60 19.073,43.621 r0 bottom
R105 "22R" RES_C_1608X60 22.388,28.371 r0 top
R106 "22R" RES_C_1608X60 22.388,26.497 r0 top
R107 "22R" RES_C_1608X60 22.388,24.622 r0 top
R108 "16.5k1%" RES_C_1608X60 14.986,24.622 r0 top
R109 "16.5k1%" RES_C_1608X60 14.986,26.67 r0 top
R110 "10k" RES_C_1608X60 14.986,12.335 r0 top
R111 "2.2k" RES_C_1608X60 4.191,18.627 r180 bottom
R112 "2.2k" RES_C_1608X60 4.191,16.557 r180 bottom
R113 "22R" RES_C_1608X60 14.986,16.43 r180 top
R114 "22R" RES_C_1608X60 14.986,14.383 r180 top
R115 "22R" RES_C_1608X60 14.986,22.574 r180 top
R116 "22R" RES_C_1608X60 14.986,20.526 r180 top
R117 "22R" RES_C_1608X60 14.986,18.478 r180 top
R118 "22R" RES_C_1608X60 28.475,35.78 r180 top
R119 "22R" RES_C_1608X60 28.475,32.269 r180 top
R120 "22R" RES_C_1608X60 69.4,15.619 r180 top
R121 "22R" RES_C_1608X60 69.36,22.171 r0 top
R122 "22R" RES_C_1608X60 69.4,17.803 r180 top
R123 "22R" RES_C_1608X60 69.4,11.25 r0 top
R124 "22R" RES_C_1608X60 69.4,19.987 r180 top
R125 "22R" RES_C_1608X60 69.36,28.724 r0 top
R126 "22R" RES_C_1608X60 69.36,24.356 r180 top
R127 "22R" RES_C_1608X60 69.36,26.54 r180 top
R128 "22R" RES_C_1608X60 69.36,30.908 r180 top
R129 "22R" RES_C_1608X60 69.36,33.093 r180 top
R130 "22R" RES_C_1608X60 69.36,35.277 r180 top
R131 "22R" RES_C_1608X60 69.36,37.461 r180 top
R132 "22R" RES_C_1608X60 69.36,39.645 r180 top
R133 "22R" RES_C_1608X60 69.36,41.83 r180 top
R134 "22R" RES_C_1608X60 69.36,44.014 r180 top
R135 "10k" RES_C_1608X60 59.701,18.634 r270 top
R136 "36.5k" RES_C_1608X60 35.637,52.525 r90 bottom
R137 "36.5k" RES_C_1608X60 47.488,52.525 r90 bottom
R138 "10k" RES_C_1608X60 28.475,34.095 r0 top
R139 "4.7k" RES_C_1608X60 29.13,34.907 r270 bottom
R140 "4.7k" RES_C_1608X60 39.896,34.907 r90 bottom
R141 "22R" RES_C_1608X60 37.744,40.882 r270 bottom
R142 "22R" RES_C_1608X60 35.66,40.882 r270 bottom
R143 "22R" RES_C_1608X60 33.576,40.882 r270 bottom
R144 "22R" RES_C_1608X60 31.492,40.882 r270 bottom
R145 "10k" RES_C_1608X60 28.475,30.583 r0 top
R146 "6.65k" RES_C_1608X60 37.387,52.525 r270 top
R147 "6.65k" RES_C_1608X60 49.238,52.525 r270 top
R148 "1k" RES_C_1608X60 33.387,50.275 r180 top
R149 "10k" RES_C_1608X60 11.648,70.784 r180 top
R150 "1k" RES_C_1608X60 45.238,50.275 r180 top
R151 "10k" RES_C_1608X60 37.387,52.525 r90 bottom
R152 "10k" RES_C_1608X60 49.238,52.525 r90 bottom
R153 "4.7k" RES_C_1608X60 5.779,39.55 r0 bottom
R154 "22R" RES_C_1608X60 33.553,27.165 r180 bottom
R155 "4.7k" RES_C_1608X60 43.179,13.549 r90 bottom
TVS1 "TVS2200DRVR" TVS2200 65.363,15.722 r270 top
TVS2 "TVS2200DRVR" TVS2200 4.289,62.099 r0 top
U1 "TPS259470ARPWR" VQFN-HR-10 61.428,14.781 r270 top
U2 "TPS5430DDAR" TPS5430DDAR 42.212,13.558 r270 top
U3 "TPS259470ARPWR" VQFN-HR-10 7.879,69.068 r180 top
U4 "TPS7A4533DCQR" SOT223_6 23.783,14.668 r270 top
U5 "ADN8834" ADN8834 7.312,53.775 r180 top
U6 "ADN8834" ADN8834 19.25,53.775 r180 top
U7 "ADN8834" ADN8834 31.637,53.775 r180 top
U8 "ADN8834" ADN8834 43.488,53.775 r180 top
U9 "ADG1414BCPZ-REEL7" ADG1414BCPZ-REEL7 7.977,43.645 r180 bottom
U12 "STM32F765VGT7" LQFP100_STM 48,33.45 r0 top locked
U13 "OPA2340UA" SO8 57.912,55.381 r90 top
U14 "OPA2340UA" SO8 63.881,55.381 r270 top
U15 "OPA2340UA" SO8 63.828,55.528 r90 bottom
U16 "OPA2340UA" SO8 57.859,55.528 r270 bottom
U17 "PCA9508DP,118" TSOP8 18.606,44.802 r90 top
U18 "PCA9508DP,118" TSOP8 18.606,34.25 r90 top
U19 "AL8843SP-13" SO8_EPAD 17.183,36.5 r0 bottom
U21 "TPL5010DDCR" TPL5010DDCR 18.682,28.609 r0 top
U22 "MB85RS2MTAPNF-G-BDERE1" MB85RS2MTAPNF-G-BDERE1 34.587,36.037 r0 bottom
X1 "25MHz" XTAL_ECS-250-12-33Q-JES-TR 35.083,33.901 r45 top value=4Mhz

## Footprints (in the part's own frame and the unit in brackets; to place one, negate y for a bottom-side part, rotate by r counter-clockwise, add the part's x,y. Pads: shape width x height; smd on the part's side, far side on the other; paste and mask are expansions set on the pad)
0532610271 [mil] "CONN HEADER SMD R/A 2POS 1.25MM"
  rect 32x67 smd paste+0: 1(24.61,-114.35) 2(-24.61,-114.35)
  rect 87x122 smd paste+0: S1(125,-0.18) S2(-125,-0.18)
  silkscreen extent -148,-132 148,88, body extent -151,-115 151,90, height 134
0532610971 [mm] "CONN HEADER SMD R/A 9POS 1.25MM"
  rect 0.8x1.6 smd mask+0.076: 1(-5,2.4) 2(-3.75,2.4) 3(-2.5,2.4) 4(-1.25,2.4) 5(0,2.4) 6(1.25,2.4) 7(2.5,2.4) 8(3.75,2.4) 9(5,2.4)
  rect 2.1x3 smd mask+0.076: S1(-7.55,-0.5) S2(7.55,-0.5)
  silkscreen extent -8.2,-2.6 8.2,4.07, body extent -8.2,-2.67 8.2,2.53, height 3.2
0532611571 [mm]
  rect 0.8x1.6 smd mask+0.076: 1(-8.75,2.4) 2(-7.5,2.4) 3(-6.25,2.4) 4(-5,2.4) 5(-3.75,2.4) 6(-2.5,2.4) 7(-1.25,2.4) 8(0,2.4) 9(1.25,2.4) 10(2.5,2.4) 11(3.75,2.4) 12(5,2.4) 13(6.25,2.4) 14(7.5,2.4) 15(8.75,2.4)
  rect 2.1x3 smd mask+0.076: S1(-11.3,-0.5) S2(11.3,-0.5)
  silkscreen extent -11.95,-2.6 11.95,4.64, body extent -11.95,-2.61 11.95,2.59, height 3.45
ADG1414BCPZ-REEL7 [mm] "IC SW SPST-NOX8 11.5OHM 24LFCSP"
  rect 0.275x0.805 smd paste+0 mask+0.127: 1(1.25,1.902) 2(0.75,1.902) 3(0.25,1.902) 4(-0.25,1.902) 5(-0.75,1.902) 6(-1.25,1.902) 13(-1.25,-1.902) 14(-0.75,-1.902) 15(-0.25,-1.902) 16(0.25,-1.902) 17(0.75,-1.902) 18(1.25,-1.902)
  rect 0.805x0.275 smd paste+0 mask+0.127: 7(-1.902,1.25) 8(-1.902,0.75) 9(-1.902,0.25) 10(-1.902,-0.25) 11(-1.902,-0.75) 12(-1.902,-1.25) 19(1.902,-1.25) 20(1.902,-0.75) 21(1.902,-0.25) 22(1.902,0.25) 23(1.902,0.75) 24(1.902,1.25)
  rect 2.65x2.65 smd paste+0 mask+0.127: HTAB(0,0)
  silkscreen extent -2.13,-2.13 2.13,2.8, body extent -2,-2 2,2, height 0.6
ADN8834 [mil] "IC THERMO COOLER DRIVER 24LFCSP"
  rrect100% 32x10 smd paste+0 mask+1.89: 1(-76.5,49.21) 2(-76.5,29.53) 3(-76.5,9.84) 4(-76.5,-9.84) 5(-76.5,-29.53) 6(-76.5,-49.21) 13(76.5,-49.21) 14(76.5,-29.53) 15(76.5,-9.84) 16(76.5,9.84) 17(76.5,29.53) 18(76.5,49.21)
  rrect100% 10x32 smd paste+0 mask+1.89: 7(-49.21,-76.5) 8(-29.53,-76.5) 9(-9.84,-76.5) 10(9.84,-76.5) 11(29.53,-76.5) 12(49.21,-76.5) 19(49.21,76.5) 20(29.53,76.5) 21(9.84,76.5) 22(-9.84,76.5) 23(-29.53,76.5) 24(-49.21,76.5)
  rect 102.36x102.36 smd paste-52 mask+1.89: 25(0,0)
  silkscreen extent -85,-86 86,86, body extent -81,-81 81,81, height 32
BM04B-SRSS-TB [mil] "CONN HEADER SMD 4POS 1MM"
  rect 26x61 smd paste+0 mask+1.97: 1(-59.06,-74.1) 2(-19.68,-74.1) 3(19.68,-74.1) 4(59.06,-74.1)
  rect 51x75 smd paste+0 mask+3.94: 5(-110.24,27.47) 6(110.24,27.47)
  silkscreen extent -123,-97 123,62, body extent -118,-85 118,57, height 172
CAP_C_1608X80 [mm] "Chip Capacitor, 2-Leads, Body 1.60x0.80mm, IPC Medium Density"
  rrect50% 0.85x0.95 smd: 1(-0.775,0) 2(0.775,0)
  silkscreen extent -0.9,-0.7 0.9,0.7, body extent -0.87,-0.48 0.87,0.48, height 0.85
DO214-AC-SMA [mm]
  rect 1.8x1.8 smd paste+0: 1(-2,0) 2(2,0)
  silkscreen extent -2.28,-1.46 2.29,1.47, body extent -2.55,-1.3 2.55,1.3, height 2.45
ESQ-107-37-G-D [mm] "CONN SOCKET 14POS 0.1 GOLD PCB"
  rect 1.37x1.37 hole 1.02: 01(-7.62,-1.27)
  round 1.37 hole 1.02: 02(-7.62,1.27) 03(-5.08,-1.27) 04(-5.08,1.27) 05(-2.54,-1.27) 06(-2.54,1.27) 07(0,-1.27) 08(0,1.27) 09(2.54,-1.27) 10(2.54,1.27) 11(5.08,-1.27) 12(5.08,1.27) 13(7.62,-1.27) 14(7.62,1.27)
  silkscreen extent -9.15,-3.14 9.15,2.47, body extent -9.14,-2.54 9.14,2.54, height 11.13
HOLE_SPACE [mm]
  round 1 hole 0.5: 1(-2.325,0) 1(-1.644,-1.644) 1(-1.644,1.644) 1(0,-2.286) 1(0,2.325) 1(1.644,-1.644) 1(1.644,1.644) 1(2.325,0)
  round 6 hole 3.3: 1(0,0)
JP3-D1C [mm] "3 pins, 1 row, right angled, gold plating"
  rect 1.6x1.6 hole 1.1: 1(-6.35,2.54)
  round 1.6 hole 1.1: 2(-3.81,2.54) 3(-1.27,2.54)
  silkscreen extent -7.62,-7.34 0,1.04, body extent -7.62,-7.52 0,2.84, height 2.55
JP5-D1C [mm] "5 pins, 1 row, right angled, gold plating"
  rect 1.6x1.6 hole 1.1: 1(-11.43,2.54)
  round 1.6 hole 1.1: 2(-8.89,2.54) 3(-6.35,2.54) 4(-3.81,2.54) 5(-1.27,2.54)
  silkscreen extent -12.7,-7.34 0,1.04, body extent -12.7,-7.52 0,2.84, height 2.55
JUMPER [mm]
  rect 0.8x1.5 smd: 1(-0.8,0)
  rect 0.7x1.5 smd: 2(0.8,0)
  silkscreen extent -1.5,-1.04 1.45,1.04
JUMPER2 [mil]
  round 1 smd: 1(-0.01,19.99) 2(0,-20.01)
  Top Layer pour cut-out: -39.68,-0.07 -36.66,15.1 -28.07,27.95 -15.22,36.54 -0.05,39.56 -0.05,39.56 15.11,36.54 27.97,27.95 36.56,15.1 39.58,-0.07 39.58,-0.07 36.56,-15.23 27.97,-28.09 15.11,-36.68 -0.05,-39.7 -0.05,-39.7 -15.22,-36.68 -28.07,-28.09 -36.66,-15.23 -39.68,-0.07
  Top Layer region: 28.93,-8.2 -28.93,-8.2 -23.36,-20.34 -13.01,-28.79 0,-31.82 13.02,-28.79 23.37,-20.34 28.93,-8.2
  Top Layer region: -28.94,8.18 28.92,8.18 23.36,20.33 13.01,28.78 -0.01,31.8 -13.03,28.78 -23.38,20.33 -28.94,8.18
  silkscreen extent -40,-40 40,40
L-SMD-0603 [mm]
  rect 0.6x0.9 smd: 1(-0.8,0) 2(0.8,0)
  silkscreen extent -1.4,-0.72 1.4,0.72, body extent -0.8,-0.4 0.8,0.4, height 0.81
L-SMD-M-3.5X3.5X2MM [mm]
  rect 1.5x1 smd: 1(0.032,-1.385) 2(0.032,1.461)
  silkscreen extent -1.73,-2.2 1.73,2.2, body extent -1.58,-1.73 1.62,1.76, height 1.84
L-SMD-M-4.8X4.8X2.8MM [mm]
  rect 4.2x2 smd: 1(0,-2.17) 2(0,2.17)
  silkscreen extent -2.61,-2.52 2.58,2.52, body extent -2.41,-2.4 2.41,2.4, height 2.76
LED-0603-BLUE [mm] "LED SMD; Body 1.6 x 0.8 mm (LxW typ)"
  rect 1.1x1 smd mask+0.1: 1(-0.851,0) 2(0.849,0)
  silkscreen extent -1.71,-0.81 1.78,0.81, body extent -0.8,-0.4 0.8,0.4, height 0.75
LQFP100_STM [mil]
  rect 58x11 smd paste+0 mask+4.72: 1(-304,236.22) 2(-304,216.54) 3(-304,196.85) 4(-304,177.17) 5(-304,157.48) 6(-304,137.8) 7(-304,118.11) 8(-304,98.43) 9(-304,78.74) 10(-304,59.06) 11(-304,39.37) 12(-304,19.69) 13(-304,0) 14(-304,-19.68) 15(-304,-39.37) 16(-304,-59.06) 17(-304,-78.74) 18(-304,-98.43) 19(-304,-118.11) 20(-304,-137.8) 21(-304,-157.48) 22(-304,-177.17) 23(-304,-196.85) 24(-304,-216.54) 25(-304,-236.22) 51(304,-236.22) 52(304,-216.54) 53(304,-196.85) 54(304,-177.17) 55(304,-157.48) 56(304,-137.8) 57(304,-118.11) 58(304,-98.43) 59(304,-78.74) 60(304,-59.06) 61(304,-39.37) 62(304,-19.68) 63(304,0) 64(304,19.69) 65(304,39.37) 66(304,59.06) 67(304,78.74) 68(304,98.43) 69(304,118.11) 70(304,137.8) 71(304,157.48) 72(304,177.17) 73(304,196.85) 74(304,216.54) 75(304,236.22)
  rect 11x58 smd paste+0 mask+4.72: 26(-236.22,-304) 27(-216.54,-304) 28(-196.85,-304) 29(-177.17,-304) 30(-157.48,-304) 31(-137.8,-304) 32(-118.11,-304) 33(-98.43,-304) 34(-78.74,-304) 35(-59.06,-304) 36(-39.37,-304) 37(-19.68,-304) 38(0,-304) 39(19.68,-304) 40(39.37,-304) 41(59.06,-304) 42(78.74,-304) 43(98.43,-304) 44(118.11,-304) 45(137.8,-304) 46(157.48,-304) 47(177.17,-304) 48(196.85,-304) 49(216.54,-304) 50(236.22,-304) 76(236.22,304) 77(216.54,304) 78(196.85,304) 79(177.17,304) 80(157.48,304) 81(137.8,304) 82(118.11,304) 83(98.43,304) 84(78.74,304) 85(59.06,304) 86(39.37,304) 87(19.68,304) 88(0,304) 89(-19.68,304) 90(-39.37,304) 91(-59.06,304) 92(-78.74,304) 93(-98.43,304) 94(-118.11,304) 95(-137.8,304) 96(-157.48,304) 97(-177.17,304) 98(-196.85,304) 99(-216.54,304) 100(-236.22,304)
  silkscreen extent -366,-353 353,353, body extent -319,-319 319,319, height 63
M80-5114242 [mm] "CONN HEADER VERT 42POS 2MM"
  rect 1.258x1.258 / inner round 1.258 / far side rect 1.258x1.258 hole 0.75: 1(-20,-1)
  round 1.258 hole 0.75: 2(-18,-1) 3(-16,-1) 4(-14,-1) 5(-12,-1) 6(-10,-1) 7(-8,-1) 8(-6,-1) 9(-4,-1) 10(-2,-1) 11(0,-1) 12(2,-1) 13(4,-1) 14(6,-1) 15(8,-1) 16(10,-1) 17(12,-1) 18(14,-1) 19(16,-1) 20(18,-1) 21(20,-1) 22(-20,1) 23(-18,1) 24(-16,1) 25(-14,1) 26(-12,1) 27(-10,1) 28(-8,1) 29(-6,1) 30(-4,1) 31(-2,1) 32(0,1) 33(2,1) 34(4,1) 35(6,1) 36(8,1) 37(10,1) 38(12,1) 39(14,1) 40(16,1) 41(18,1) 42(20,1)
  round 2.3 hole 2.3 unplated: ""(-23.5,0) ""(23.5,0)
  Keep-Out Layer circle w2: c23.5,0 r1
  Keep-Out Layer circle w2: c-23.5,0 r1
  Keep-Out Layer circle w2: c-23.5,0 r1
  Keep-Out Layer circle w2: c23.5,0 r1
  Keep-Out Layer circle w2: c23.5,0 r1
  Keep-Out Layer circle w2: c-23.5,0 r1
  Keep-Out Layer circle w2: c-23.5,0 r1
  Keep-Out Layer circle w2: c23.5,0 r1
  silkscreen extent -26.04,-3.86 26.04,3.3, body extent -26,-3.28 26,2.78, height 5.66
M80-6661642 [mm] "CONN HEADER SMD R/A 16POS 2MM"
  rect 1x1.5 smd: 1(7,6.85) 2(5,6.85) 3(3,6.85) 4(1,6.85) 5(-1,6.85) 6(-3,6.85) 7(-5,6.85) 8(-7,6.85) 9(7,4.35) 10(5,4.35) 11(3,4.35) 12(1,4.35) 13(-1,4.35) 14(-3,4.35) 15(-5,4.35) 16(-7,4.35)
  round 1.458 hole 0.95: SH1(-9.25,2.75) SH2(9.25,2.75) SH3(-9.25,-2) SH4(9.25,-2)
  silkscreen extent -10.05,-0.95 10.05,8.43, body extent -9.95,-5.83 9.95,7.12, height 5.98
MB85RS2MTAPNF-G-BDERE1 [mm]
  rrect50% 1.64x0.59 smd: 1(-2.635,1.905) 2(-2.635,0.635) 3(-2.635,-0.635) 4(-2.635,-1.905) 5(2.635,-1.905) 6(2.635,-0.635) 7(2.635,0.635) 8(2.635,1.905)
  silkscreen extent -4.3,-2.65 2.17,2.65, body extent -3.01,-2.57 3.01,2.57, height 1.73
PSM6050 [mm]
  rect 3.5x2.95 smd: 1(0,-2.725) 2(0,2.725)
  silkscreen extent -3.58,-3.9 3.6,3.96, body extent -3.3,-3.65 3.3,3.65
RES_C_1608X60 [mm] "Chip Resistor, 2-Leads, Body 1.63x0.83mm, IPC High Density"
  rrect50% 0.85x0.95 smd: 1(-0.775,0) 2(0.775,0)
  silkscreen extent -0.9,-0.7 0.9,0.7, body extent -0.87,-0.48 0.87,0.48, height 0.6
RES_C_3216X70 [mm] "Chip Resistor, 2-Leads, Body 3.20x1.60mm, IPC Medium Density"
  rrect39% 1.25x1.75 smd: 1(-1.4,0) 2(1.4,0)
  silkscreen extent -0.6,-0.9 0.6,0.9, body extent -1.68,-0.87 1.68,0.87, height 0.71
SO8 [mm] "SOIC, 8-Leads, Body 4.9x3.9mm, Pitch 1.27mm, IPC High Density"
  oval 1.8x0.6 smd: 1(-2.825,1.905) 2(-2.825,0.635) 3(-2.825,-0.635) 4(-2.825,-1.905) 5(2.825,-1.905) 6(2.825,-0.635) 7(2.825,0.635) 8(2.825,1.905)
  silkscreen extent -2.95,-2.55 1.68,2.98, body extent -2.99,-2.45 3,2.45, height 1.6
SO8_EPAD [mm]
  oval 1.8x0.6 smd: 1(-2.842,1.862) 2(-2.842,0.592) 3(-2.842,-0.678) 4(-2.842,-1.948) 5(2.808,-1.948) 6(2.808,-0.678) 7(2.808,0.592) 8(2.808,1.862)
  rect 2.718x3.404 smd paste-1.689 mask+0: EPAD(-0.018,-0.073)
  silkscreen extent -2.97,-2.59 1.66,2.94, body extent -3.01,-2.49 2.98,2.41, height 1.6
SOD-123 [mm] "SOD123, 2-Leads, Body 2.6x1.6mm, Pitch 3.05mm, IPC High Density"
  rect 1.3x1.15 smd: 1(0,1.55) 2(0,-1.55)
  silkscreen extent -0.95,-1.5 0.93,1.5, body extent -0.8,-1.85 0.8,1.85, height 1.27
SOT23-13_2 [mm] "SOT23, 1=bottom-left, 2=top, 3=bottom-right"
  rect 0.9x0.95 smd: 1(-0.95,-1.25) 2(0,1.25)
  rect 0.9x0.95 smd mask+0: 3(0.95,-1.25)
  silkscreen extent -1.3,-0.38 1.3,1.25, body extent -1.52,-1.23 1.48,1.27, height 1.06
SOT223_6 [mm] "SOT223, 6-Leads, Body 6.5x3.5mm, Pitch 2.3mm, Lead Span 7mm, IPC Medium Density"
  rrect14% 2.4x0.7 smd: 1(-3.05,2.54) 2(-3.05,1.27) 3(-3.05,0) 4(-3.05,-1.27) 5(-3.05,-2.54)
  rrect4% 2.4x3.2 smd: 6(3,0)
  silkscreen extent -3.17,-3.3 1.53,3.56, body extent -3.5,-3.25 3.46,3.25, height 1.64
SW1-SMD [mm]
  rect 1.2x0.8 smd: 1(-3.5,0) 2(3.5,0)
  silkscreen extent -2.82,-1.85 2.82,1.85, body extent -3.05,-1.85 3.05,1.85, height 2.5
TANTALUM-SMD-1206 [mm]
  rect 1.4x1.8 smd paste+0: 1(1.298,0) 2(-1.302,0)
  silkscreen extent -2.24,-1.11 2.23,1.14, body extent -2.1,-1 2.1,1, height 0.25
TPL5010DDCR [mm]
  rect 1.2x0.6 smd paste+0: 1(-1.15,0.95) 2(-1.15,0) 3(-1.15,-0.95) 4(1.15,-0.95) 5(1.15,0) 6(1.15,0.95)
  silkscreen extent -1.65,-1.65 1,1.94, body extent -1.5,-1.52 1.5,1.52, height 1.45
TPS5430DDAR [mm] "IC REG BUCK ADJ 3A 8SOPWR"
  rrect10% 1.55x0.6 smd mask+0: 1(-2.7,1.905) 2(-2.7,0.635) 3(-2.7,-0.635) 4(-2.7,-1.905) 5(2.7,-1.905) 6(2.7,-0.635) 7(2.7,0.635) 8(2.7,1.905)
  round 0.3 hole 0.2 mask+0: 6(-0.65,1.95) 6(-0.65,-0.65) 6(-0.65,-1.95) 6(0.65,1.95) 6(0.65,-0.65) 6(0.65,-1.95)
  rect 2.95x4.9 smd paste+0: 9(0,0)
  silkscreen extent -4.17,-2.69 1.96,2.72, body extent -3,-2.45 3,2.45, height 1.7
TSOP8 [mm] "TSOP, 8-Leads, Body 3x3mm, Pitch 0.65mm, IPC High Density"
  oval 1.4x0.35 smd mask+0.05: 1(-2.05,0.975) 2(-2.05,0.325) 3(-2.05,-0.325) 4(-2.05,-0.975) 5(2.05,-0.975) 6(2.05,-0.325) 7(2.05,0.325) 8(2.05,0.975)
  silkscreen extent -2.17,-1.55 0.95,1.87, body extent -2.35,-1.5 2.35,1.5, height 1.5
TVS2200 [mm]
  rect 0.45x0.3 smd paste+0 mask+0.051: 1(-0.977,0.651) 2(-0.977,0.001) 3(-0.977,-0.649) 4(0.973,-0.649) 5(0.973,0.001) 6(0.973,0.651)
  rect 1x1.6 smd paste-0.5 mask+0.051: 7(-0.002,0.001)
  silkscreen extent -1.05,-1.2 1.05,1.2, body extent -1,-1 1,1, height 0.8
VQFN-HR-10 [mm]
  rect 0.65x0.3 smd: 1(-0.938,0.692) 4(-0.941,-0.708) 7(0.909,-0.708) 10(0.909,0.692)
  rect 0.25x0.65 smd: 1(-0.738,0.867) 4(-0.741,-0.883) 7(0.709,-0.883) 10(0.709,0.867)
  rect 0.65x0.25 smd: 2(-0.938,0.216) 3(-0.941,-0.233) 8(0.909,-0.233) 9(0.909,0.216)
  rect 0.3x2.4 smd: 5(-0.265,-0.008) 6(0.235,-0.007)
  silkscreen extent -1.3,-1.25 1.28,1.23, body extent -1.03,-1.01 0.97,0.99, height 1
XTAL_ECS-250-12-33Q-JES-TR [mm]
  rect 1.3x1.1 smd: 1(-1.15,-0.9) 2(1.15,-0.9) 3(1.15,0.9) 4(-1.15,0.9)
  silkscreen extent -1.25,-2 0.3,1.25, body extent -1.6,-1.25 1.6,1.25, height 0.8

## Part data
BT1: library part SW2, "Switch button 2 pin"
C1 C2 C8 C9 C12 C13 C17 C18: library part "Cap_Tantalum SMD", "SMD", Chung_Loai=Dán, Don_Vi=Con, Ma_Hang=MH001956, So_Chan=2, Ten_Linh_Kien="Tụ tantalum 477A-470uF 10V SMD7343"
C3 C4 C5 C6 C7 C10 C11 C14 C15 C16 C19 C20 C21 C22 C23 C24 C25 C26 C27 C28 C29 C30 C31 C32 C33 C34 C35 C36 C37 C38 C39 C40 C41 C42 C43 C44 C45 C46 C75 C76 C77 C78 C79 C80 C81 C82 C83 C84 C85 C86 C87 C88 C89 C90 C91 C92 C93 C94 C95 C96 C97 C98 C99 C100 C101 C102 C103 C104 C105 C106 C107 C108 C109 C110 C111 C112 C113 C114 C115 C116 C117 C118 C119 C120 C121 C122 C123 C124 C125 C126 C127 C128 C129 C130 C136 C137 C138 C139 C143 C144 C145 C146 C148 C149 C150 C151 C152 C153 C154 C155 C156: library part Capacitors
D1 D2 D3 D4: "DIODE SCHOTTKY 60V 3A DO214AA"
D5: library part 1N4148-W-7, "DIODE GEN PURP 100V 300MA SOD123", MFR="Diodes Incorporated", MPN=1N4148W-7-F, Solder=SMT
DAC1 DAC2 DAC3 DAC4: "12 Bit Digital to Analog Converter, P/N: MCP4921-E/SN"
DS1 DS2 DS3 DS4 DS5 DS6: library part "LED SMD"
J1: library part CONN_TH_42, "CONN HEADER VERT 42POS 2MM"
J3: library part CONN_SMD_15, "Conn Shrouded Header (4 Sides) HDR 15 POS 1.25mm Solder RA Side Entry SMD PicoBladeâ„¢ T/R", Package=None, Availability="In Stock", Check_prices=https://www.snapeda.com/parts/532611571/Molex/view-part/?ref=eda, MF=Molex, MP=532611571, Price=None, Purchase-URL=https://pricing.snapeda.com/search/part/532611571/?ref=eda, SnapEDA_Link=https://www.snapeda.com/parts/532611571/Molex/view-part/?ref=snap
J4: library part CONN_SMD_09, "CONN HEADER SMD R/A 9POS 1.25MM"
J5 J7: library part CONN_SMD_16, "CONN HEADER SMD R/A 16POS 2MM"
J6: "WR-PHD 2.54 mm Angled Socket Header", Manufacturer="W¨¹rth Elektronik eiSos GmbH", partNo=613005143121, ComponentLink1 Description=Manufacturer, ComponentLink1URL=http://www.we-online.com, ComponentLink2 Description=Datasheet, ComponentLink2URL=http://katalog.we-online.de/em/datasheet/6130xx143121.pdf, Created by="Karrer Zheng", Created Date="29 March 2013", NoPins=05
J8 J9: "CONN HEADER SMD 4POS 1MM"
J10: library part CONN_SMD_02, "CONN HEADER SMD R/A 2POS 1.25MM"
J11: "WR-PHD 2.54 mm Angled Socket Header", Manufacturer="W¨¹rth Elektronik eiSos GmbH", partNo=613003143121, ComponentLink1 Description=Manufacturer, ComponentLink1URL=http://www.we-online.com, ComponentLink2 Description=Datasheet, ComponentLink2URL=http://katalog.we-online.de/em/datasheet/6130xx143121.pdf, Created by="Karrer Zheng", Created Date="29 March 2013", NoPins=03
J12: library part CONN_TH_14, "CONN SOCKET 14POS 0.1 GOLD PCB"
JP1 JP2 JP3: library part JUMPER
L1: "FIXED IND 22UH 2.5A 170 MOHM SMD"
L2 L3 L4 L5 L7: library part L-SMD-1, Inductance="1.0 μH", Manufacturer="Wurth Elektronik", partNo=78477010, ComponentLink1Description=Manufacturer, ComponentLink1URL=http://www.we-online.de, ComponentLink2Description=Datasheet, ComponentLink2URL=http://katalog.we-online.de/pbs/datasheet/78477010.pdf, Created by="Baojun Chen", Created Date=Nov.2015
L6: library part L-SMD-1, "SRR4828A-820M", Inductance="1.0 μH", Manufacturer="Wurth Elektronik", partNo=78477010, ComponentLink1Description=Manufacturer, ComponentLink1URL=http://www.we-online.de, ComponentLink2Description=Datasheet, ComponentLink2URL=http://katalog.we-online.de/pbs/datasheet/78477010.pdf, Created by="Baojun Chen", Created Date=Nov.2015
Q1 Q2 Q3 Q4: "MOSFET N-CH 30V 5.7A SOT23-3L"
R1 R2 R3 R4 R5 R6 R7 R8 R9 R10 R11 R12 R13 R14 R15 R16 R17 R18 R19 R20 R21 R22 R23 R24 R25 R26 R27 R28 R29 R30 R31 R32 R33 R34 R35 R36 R37 R38 R39 R40 R41 R42 R43 R44 R45 R46 R47 R48 R49 R50 R51 R52 R53 R54 R55 R56 R57 R58 R59 R60 R61 R62 R63 R64 R65 R66 R67 R68 R69 R70 R71 R72 R73 R74 R75 R76 R77 R78 R79 R80 R81 R82 R83 R84 R85 R86 R87 R88 R89 R90 R91 R92 R93 R94 R95 R96 R97 R98 R99 R100 R101 R103 R104 R105 R106 R107 R108 R109 R110 R111 R112 R113 R114 R115 R116 R117 R118 R119 R120 R121 R122 R123 R124 R125 R126 R127 R128 R129 R130 R131 R132 R133 R134 R135 R136 R137 R138 R139 R140 R141 R142 R143 R144 R145 R146 R147 R148 R149 R150 R151 R152 R153 R154 R155: library part "Res SMD", "SMD", Manufacturer="Generic Components", Class=Passive, Published=08/06/2000, Publisher="Altium Hobart Technology Centre"
R102: library part Res-SMD, "RES 0.2 OHM 1% 1W 1206", Manufacturer="Generic Components", Class=Passive, Published=08/06/2000, Publisher="Altium Hobart Technology Centre"
TVS1 TVS2: library part TVS2200, "UNIDIR PRECISION SURGE DIODE"
U2: "IC REG BUCK ADJ 3A 8SOPWR"
U4: "IC REG LINEAR 3.3V 1.5A SOT223-6"
U5 U6 U7 U8: "IC THERMO COOLER DRIVER 24LFCSP", Mfr_Name="Analog Devices Inc", RefDes=RefDes, TYPE=Type
U9: library part ADG1414, "IC SW SPST-NOX8 11.5OHM 24LFCSP"
U12: "No Description Available", Mfr_Name=STMicroelectronics, RefDes=RefDes, TYPE=Type
U19: "IC LED DRIVER RGLTR PWM 3A 8SO"
U21: "IC OSC PROG TIMER TSOT23-6"
U22: "FRAM _Ferroelectric RAM_ Memory IC 2Mb _256K x 8_ SPI 40MHz 8-SOP", Package="SO-8 Fujitsu", Digi-Key_Part_Number=865-1286-1-ND, Digi-Key_Purchase_URL=https://www.digikey.com/product-detail/en/fujitsu-electronics-america-inc/MB85RS2MTAPNF-G-BDERE1/865-1286-1-ND/7916252?utm_source=snapeda&utm_medium=aggregator&utm_campaign=symbol, MF="Fujitsu Electronics", MP=MB85RS2MTAPNF-G-BDERE1, SnapEDA_Link=https://www.snapeda.com/parts/MB85RS2MTAPNF-G-BDERE1/Fujitsu%20Electronics%20America%2C%20Inc./view-part/2344795/?ref=snap
X1: library part XT4, "Crystal, 8 MHz, -30 to 85 degC, 3.2 x 2.5 x 0.9 mm SMD"

## Via types
v1: diameter 0.4, hole 0.2, Top Layer to Bottom Layer, tented both sides, 998 vias
v2: diameter 0.4, hole 0.2, Top Layer to Bottom Layer, 1 vias

## Nets (pads, with @x,y where several pads share a name; then routed paths per layer and width w, separated by ;. In a path a pad name is that pad's centre, name@x,y a point inside that pad or via, vN(x,y) a via of type N, cw(c..) or ccw(c..) an arc to the next point about the centre after c; other vN are vias at no path point)
5V: C7.2 C8.1 C12.1 C16.2 C17.1 C121.2 C154.2 D4.1 DS2.1 JP2.1 L1.2 R9.1 R12.1 R102.2 TVS2.4 TVS2.5 TVS2.6 U3.5 U4.1 U4.2 U19.6 | length 43.6
  Top Layer w0.254: v1(43.483,17.702) 43.488,17.707 43.944,17.707 45.033,18.796 R9.1@45.033,18.846
  Top Layer w0.508: v1(25.237,20.853) 25.237,18.804 U4.1@26.323,17.718
  Mid-Layer 2 w0.254: 26.339,17.702 v1(43.483,17.702)
  Bottom Layer w0.381: DS2.1@8.623,10.35 v1(9.754,10.35)
  Bottom Layer w0.508: D4.1@23.273,38.86 24.691,38.86 25.237,38.314 v1(25.237,20.853)
  other v1: 27.33,15.316 25.273,15.342 26.289,15.342 25.832,16.332 26.746,16.332 6.97,64.007 6.342,64.995 12.423,68.954 13.465,73.013 13.465,74.445 13.465,75.807 12.444,76.48 13.465,76.95
5V_CAM: J1.1 J3.15 | length 139.8
  Mid-Layer 1 w0.635: J1.1@22.5,7 21.375,5.876 21.375,2.705 21.882,2.198 74.129,2.198 82.708,10.777 82.708,67.761 78.659,71.81 71.457,71.81 v1@71.455,71.809
  other v1: 71.457,71.809 73.025,71.811
5V_TEMP: C13.1 C24.2 C25.2 C36.2 C37.2 C83.2 C84.2 C122.2 C139.2 D3.1 DS3.1 J5.10 J5.12 J5.14 J5.16 JP2.2 R21.1 R22.1 R37.1 R39.1 U3.6 U5.15 U5.16 U6.15 U6.16 U7.15 U7.16 U8.15 U8.16 | length 81.8
  Top Layer w0.254: v1(2.083,56.515) 2.083,16.993 v1(5.639,13.437) ; v1(4.547,56.515) 4.562,56.531 C24.2@4.562,57.225 4.559,57.225 4.214,56.881 4.214,56.877 4,56.663 4,54 4.225,53.775 ; U5.16@5.369,53.525 4.475,53.525 4.225,53.775 ; U5.15@5.369,54.025 4.475,54.025 4.225,53.775 ; R21.1@13.025,54.75 v1(13.025,55.475) ; v1@16.5,56.531 C25.2@16.5,57.225 16.496,57.225 16.152,56.881 16.152,56.877 15.938,56.663 15.938,54 16.163,53.775 ; U6.16@17.307,53.525 16.413,53.525 16.163,53.775 ; U6.15@17.307,54.025 16.413,54.025 16.163,53.775 ; R22.1@25,54.75 v1(25,55.475) ; v1@28.887,56.531 C36.2@28.887,57.225 28.758,57.096 28.21,57.096 28.061,56.947 28.061,54.264 28.55,53.775 ; U7.16@29.694,53.525 28.8,53.525 28.55,53.775 ; U7.15@29.694,54.025 28.8,54.025 28.55,53.775 ; R37.1@37.387,54.75 v1(37.387,55.475) ; v1@40.738,56.531 C37.2@40.738,57.225 40.734,57.225 40.39,56.881 40.39,56.877 40.175,56.663 40.175,54 40.4,53.775 ; U8.16@41.544,53.525 40.65,53.525 40.4,53.775 ; U8.15@41.544,54.025 40.65,54.025 40.4,53.775 ; R39.1@49.238,54.75 v1(49.238,55.475)
  Bottom Layer w0.254: v1(2.083,56.515) v1(4.547,56.515) ; v1(5.639,13.437) 7.555,13.437 8.573,12.419 DS3.1@8.623,12.419
  other v1: 16.484,56.515 28.871,56.515 40.722,56.515 21,67.65 25,67.65 29,67.65 33,67.65 6.198,75.26 7.196,75.26 8.194,75.26 9.192,75.26 6.844,77.001 7.842,77.001 8.841,77.001 9.839,77.001
12V: C2.1 C6.2 C9.1 D1.1 DS1.1 JP1.2 U1.6 U2.7 U9.23 | length 86.1
  Top Layer w0.381: v1(3.505,45.415) 3.5,45.415 3.016,44.931 3,44.931 2.731,44.662 2.731,19.367 7.874,14.224 7.874,10.16 v1(9.754,8.28) 9.754,5.608 11.025,4.337 16.19,4.337 16.94,5.087 16.94,7.89 17.642,8.591 42.214,8.591 42.847,9.225 U2.7@42.847,10.858
  Bottom Layer w0.254: v1(3.505,45.415) 4.525,44.395 U9.23@6.075,44.395
  Bottom Layer w0.381: DS1.1@8.623,8.28 v1(9.754,8.28)
12V_EXP: C1.1 J1.19 J1.20 J1.21 J4.1 J12.02 J12.04 JP1.1 R2.1 TVS1.4 TVS1.5 TVS1.6 U1.5 | length 0.8
  Top Layer w0.254: v1(64.567,19.406) v1@64.57,19.409
  Top Layer w0.508: v1@64.57,19.409 R2.1@65.364,19.409
  other v1: 64.503,12.434 66.012,12.436 64.502,13.7 66.01,13.699 65.237,14.548 53.211,19.118 54.481,19.118 53.821,20.07 72.111,34.004 73.15,34.002